# Altium PCB pcb_take2.PcbDoc (part 1 of 3)
Units mm, origin at the board's own origin, x right, y up, seen from the top; angles counter-clockwise.
Board outline 120 x 150 mm, 8 copper layers (Top Layer, Power plane, Mid-Layer 1, Mid-Layer 2, Mid-Layer 3, MidLayer4, GND plane, Bottom Layer); 176 components, 197 nets, 1014 pads, 576 vias.
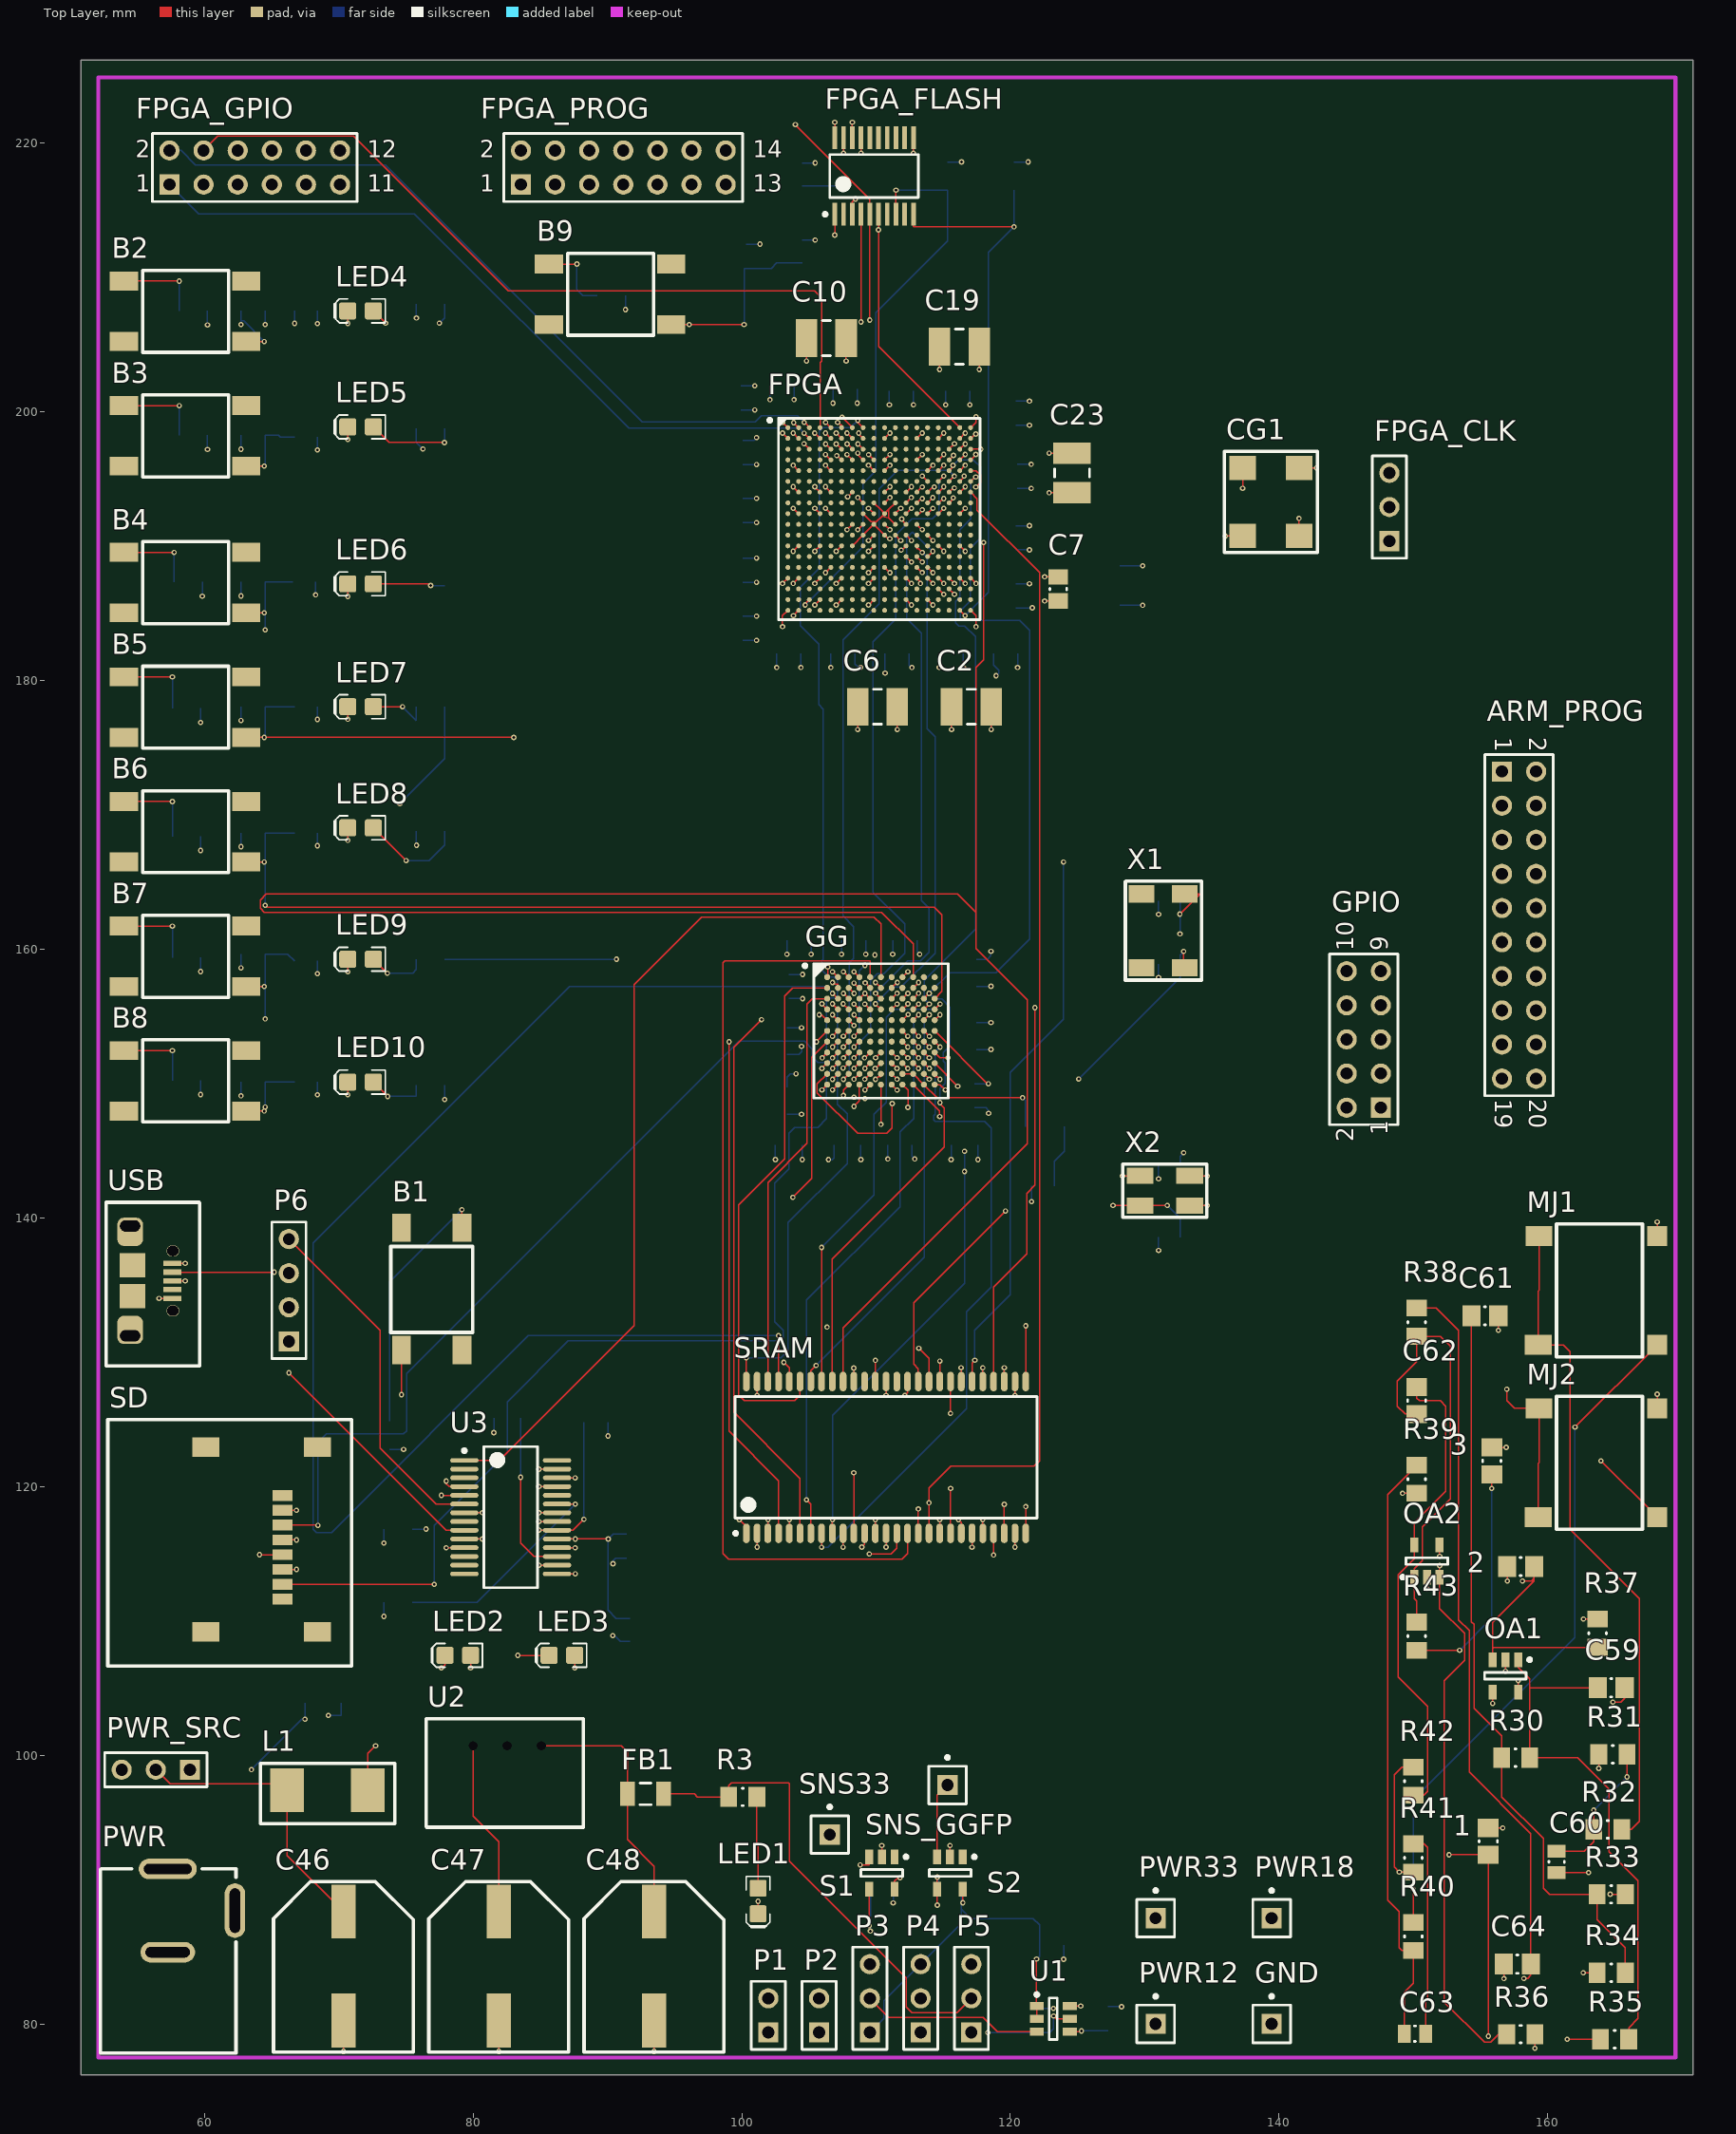
[diagram p0: Top Layer view]
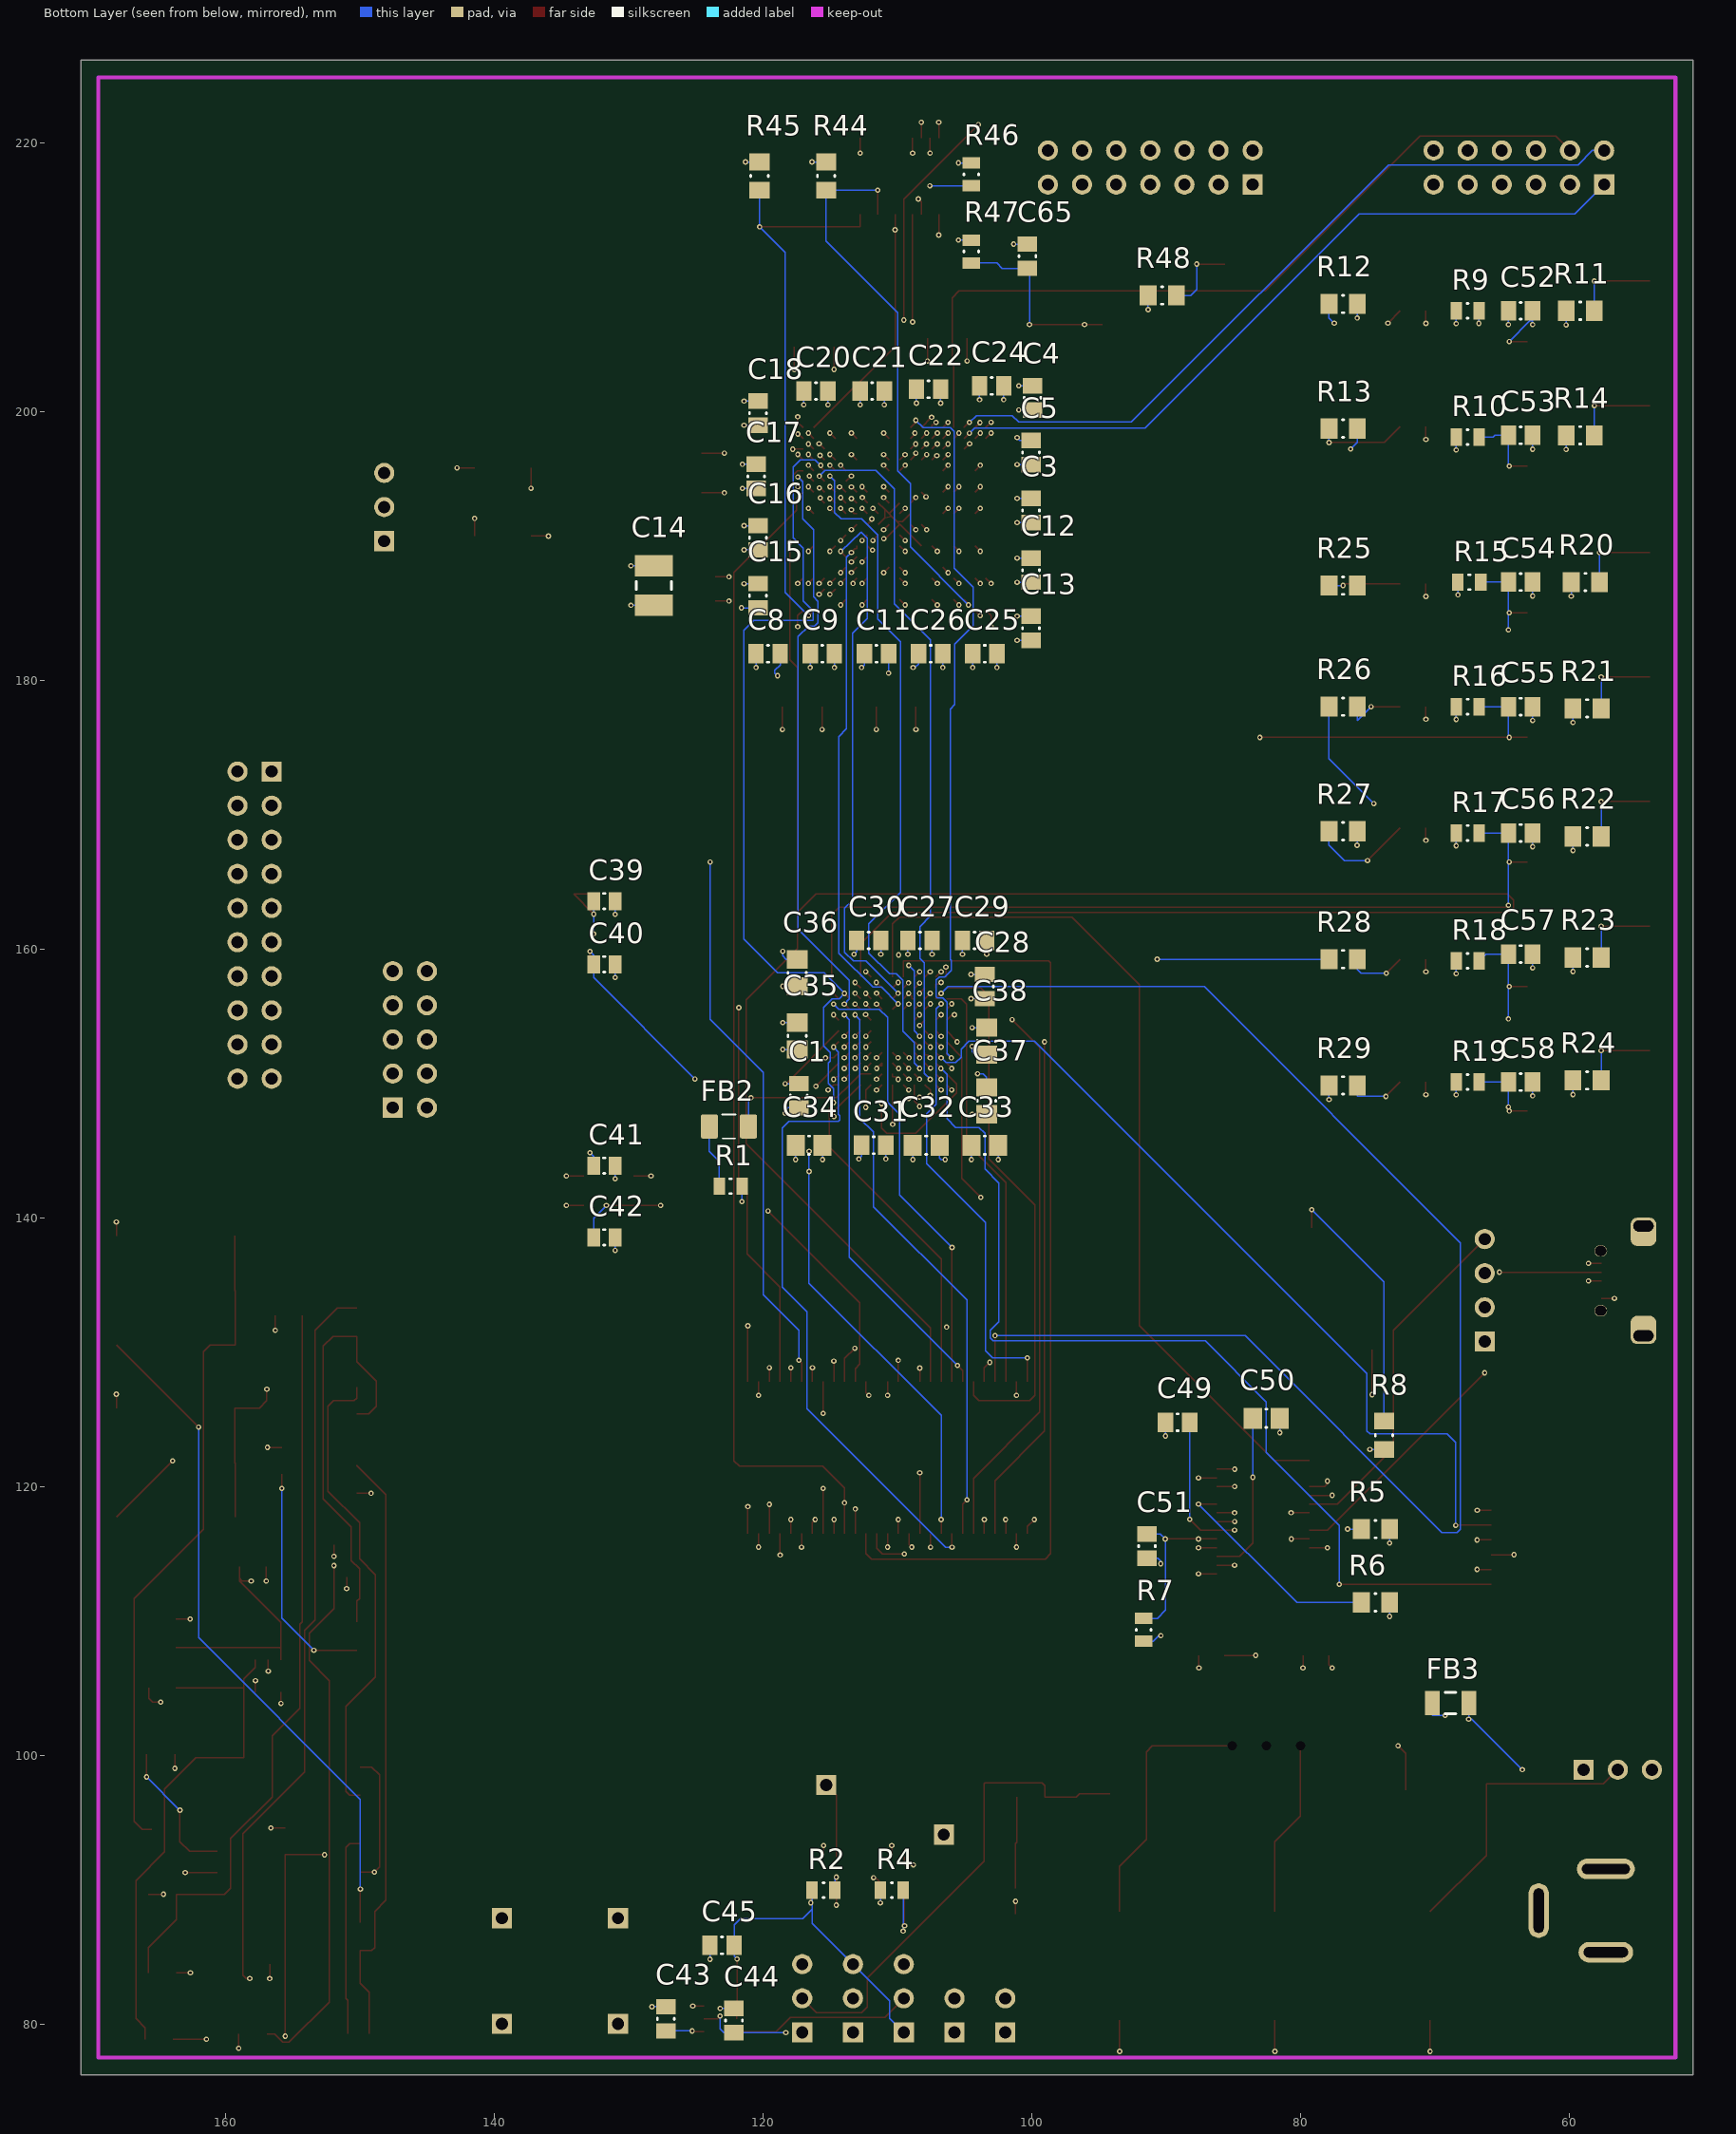
[diagram p1: Bottom Layer view, seen from below]
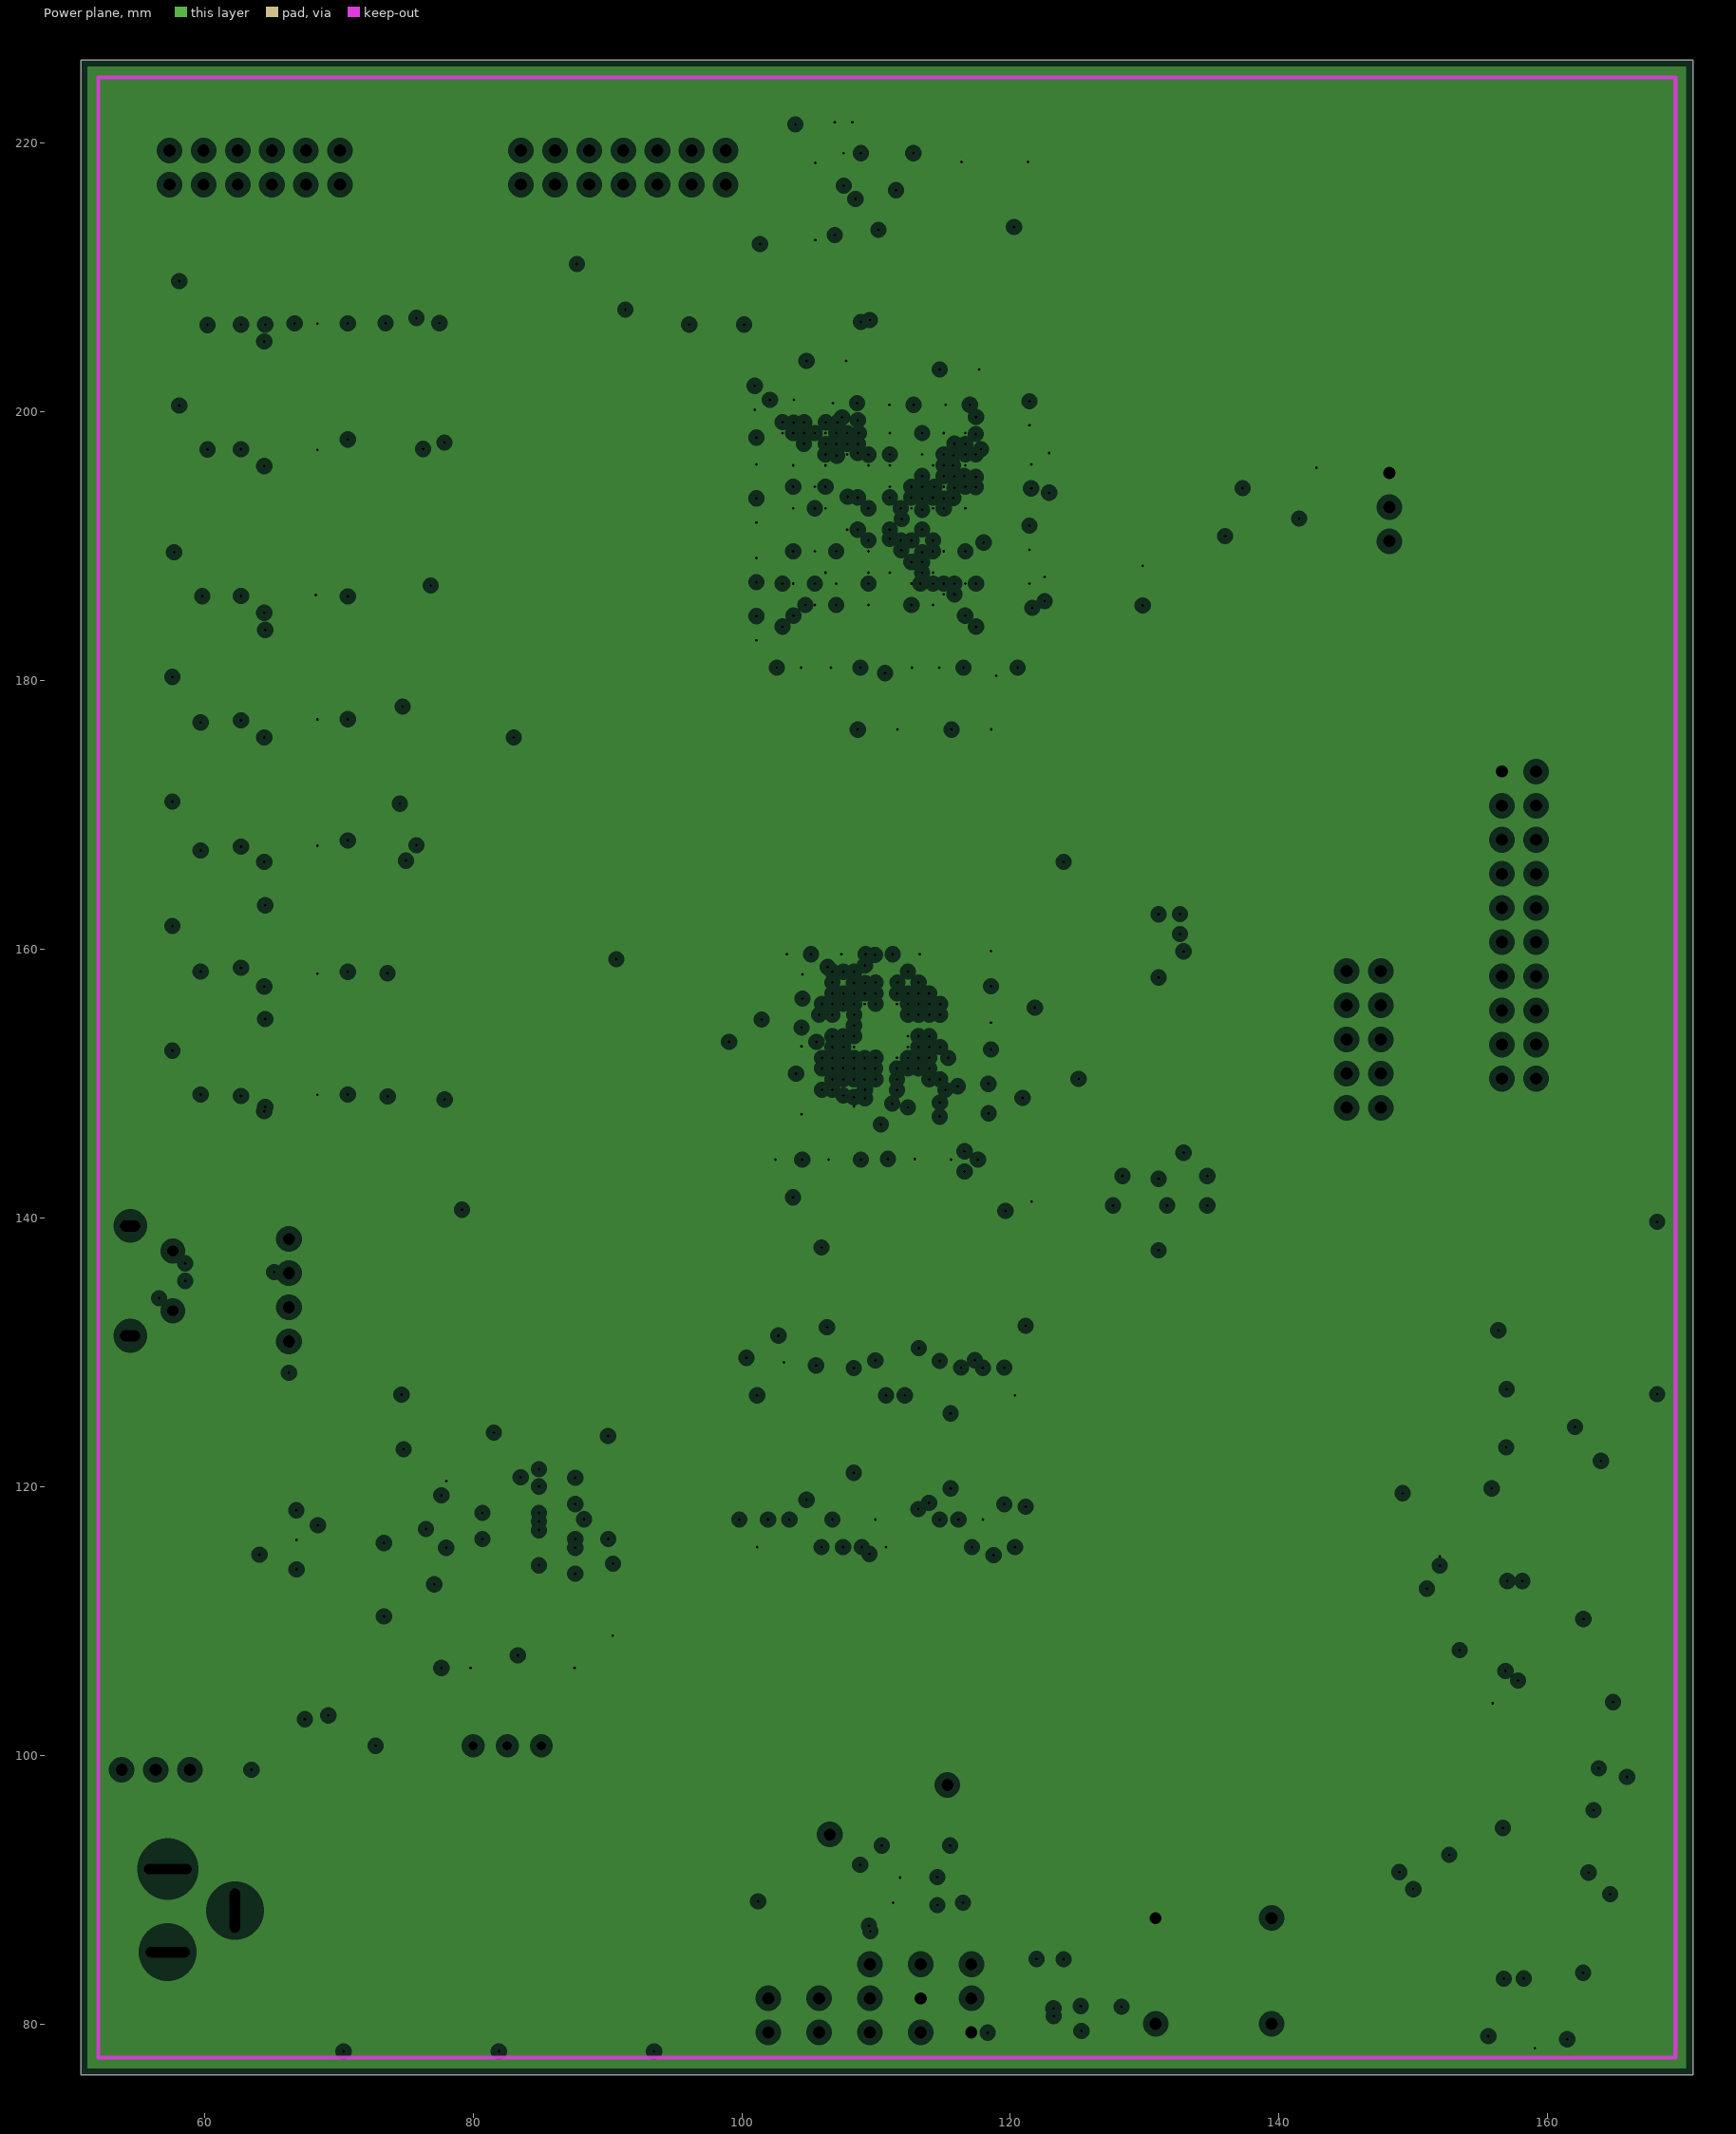
[diagram p2: Power plane, clearances drawn from the general rule]
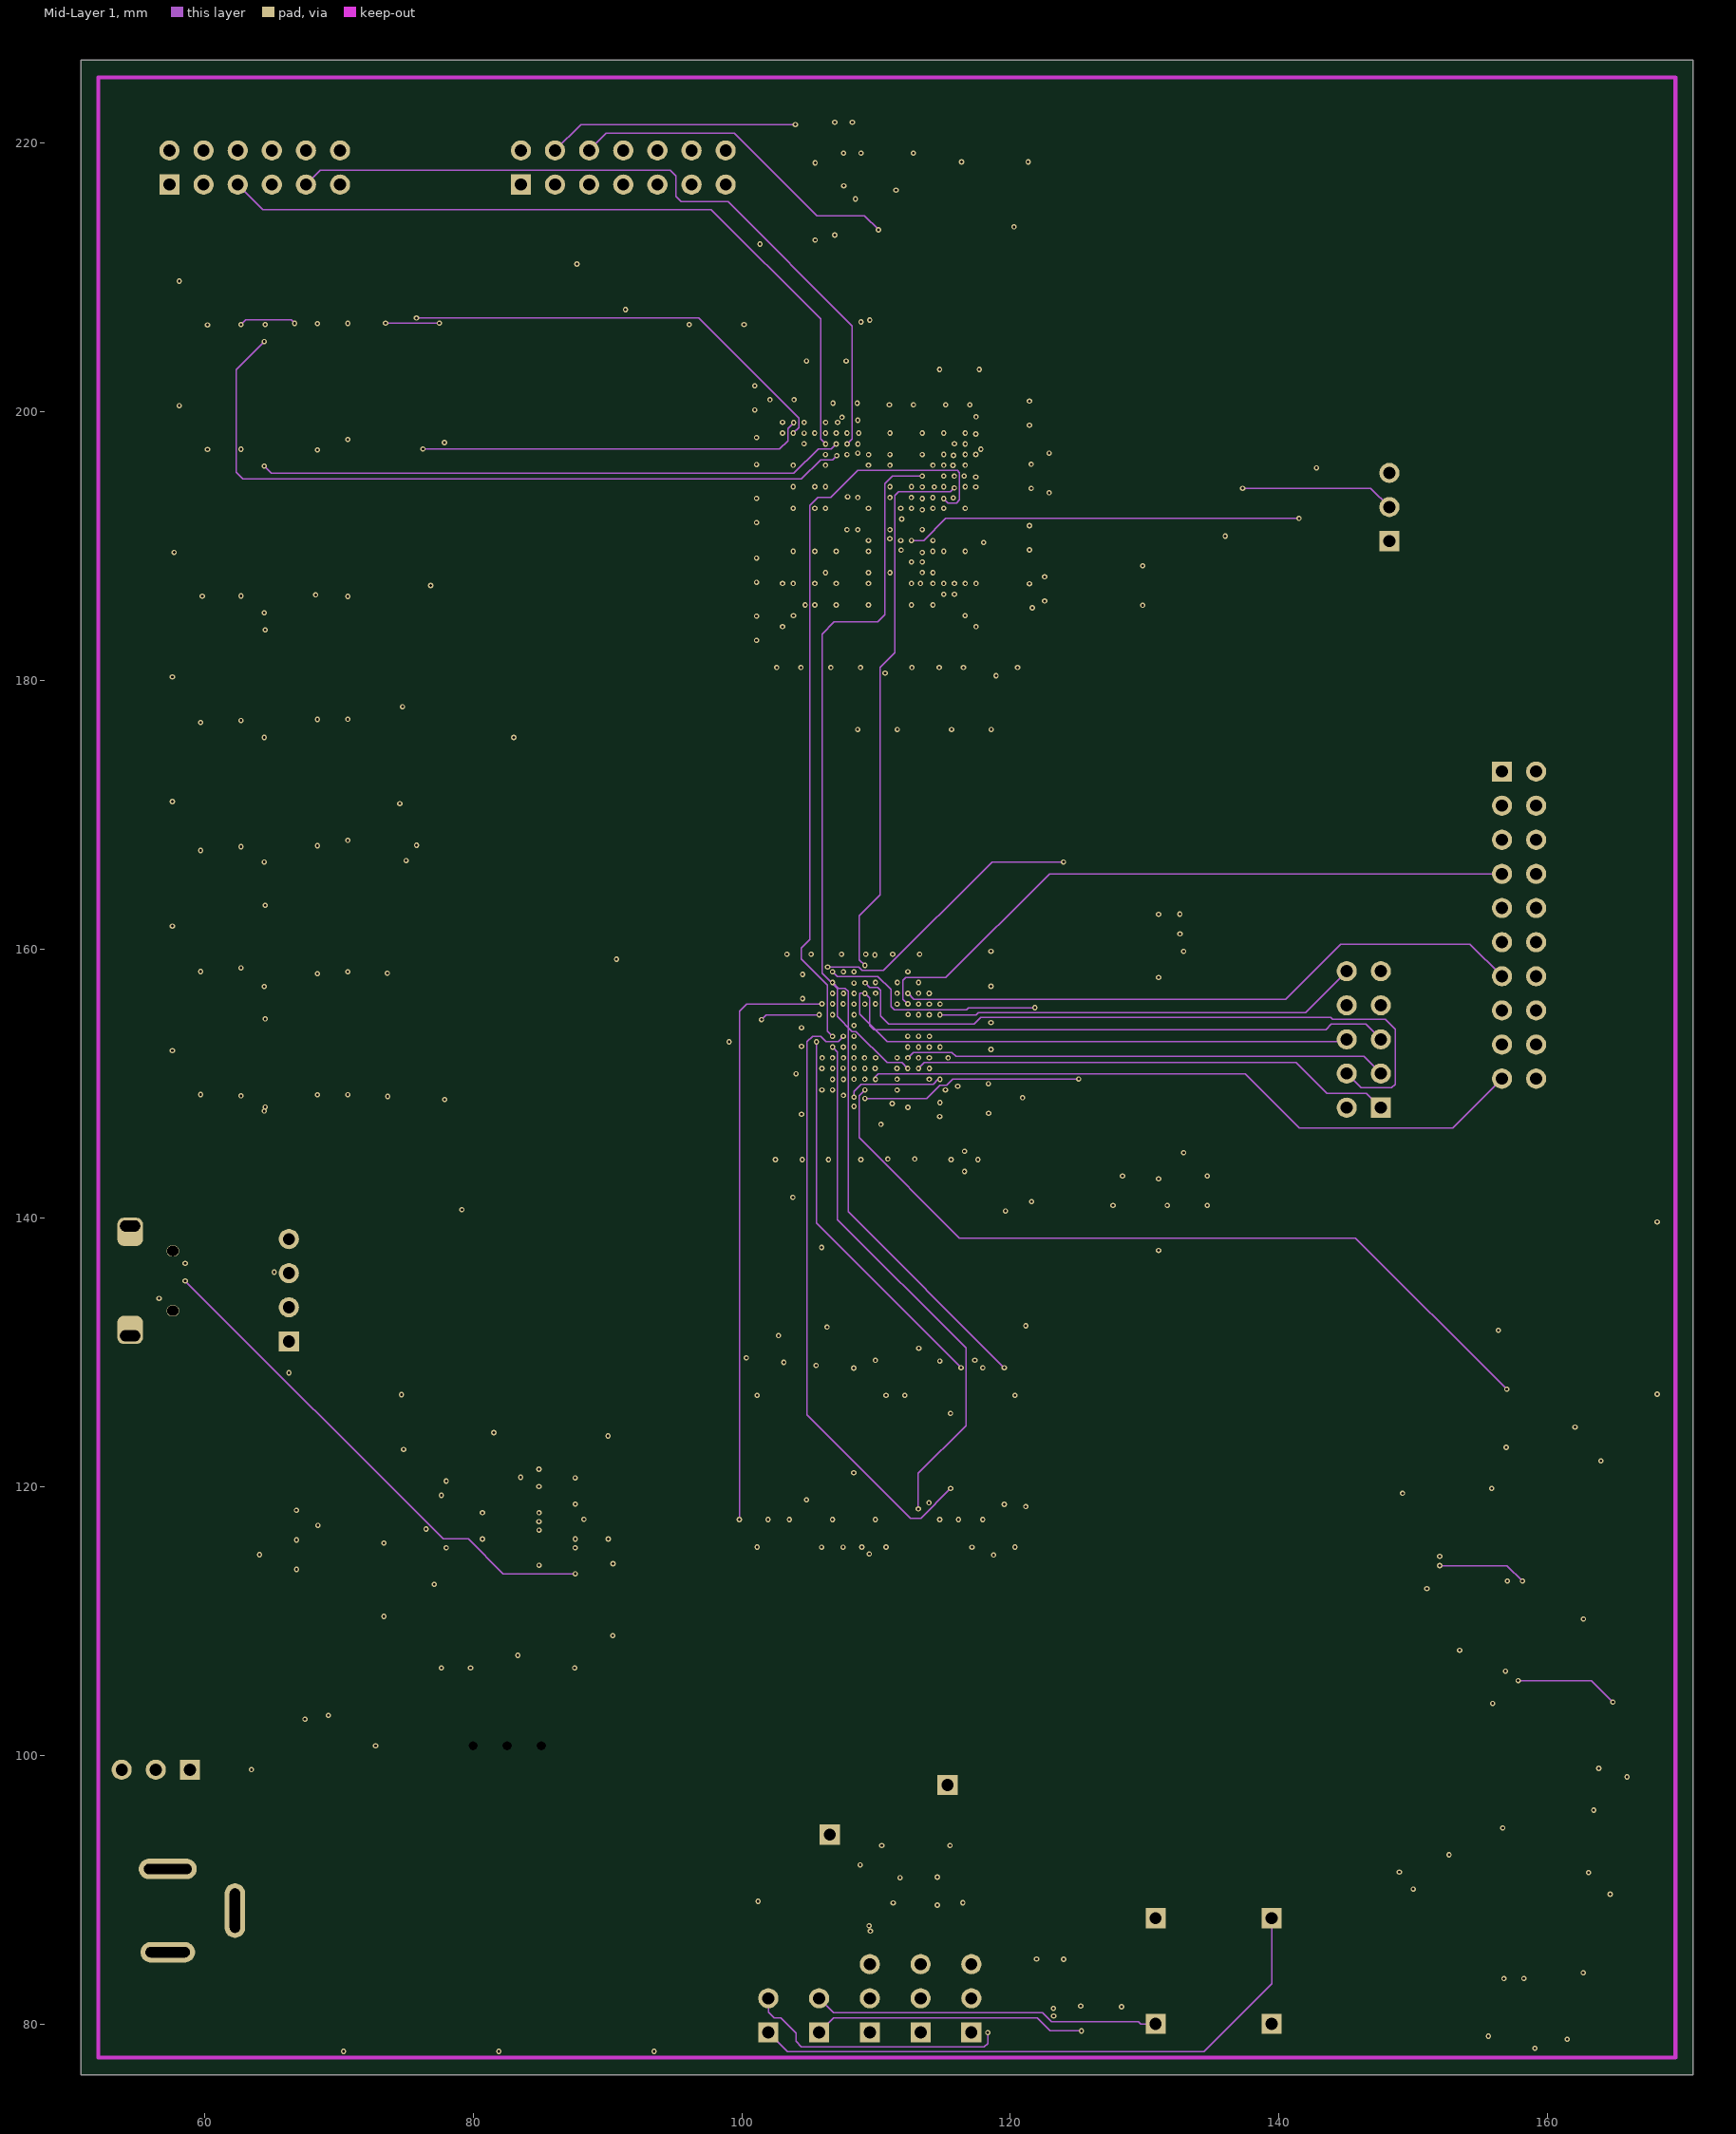
[diagram p3: Mid-Layer 1]
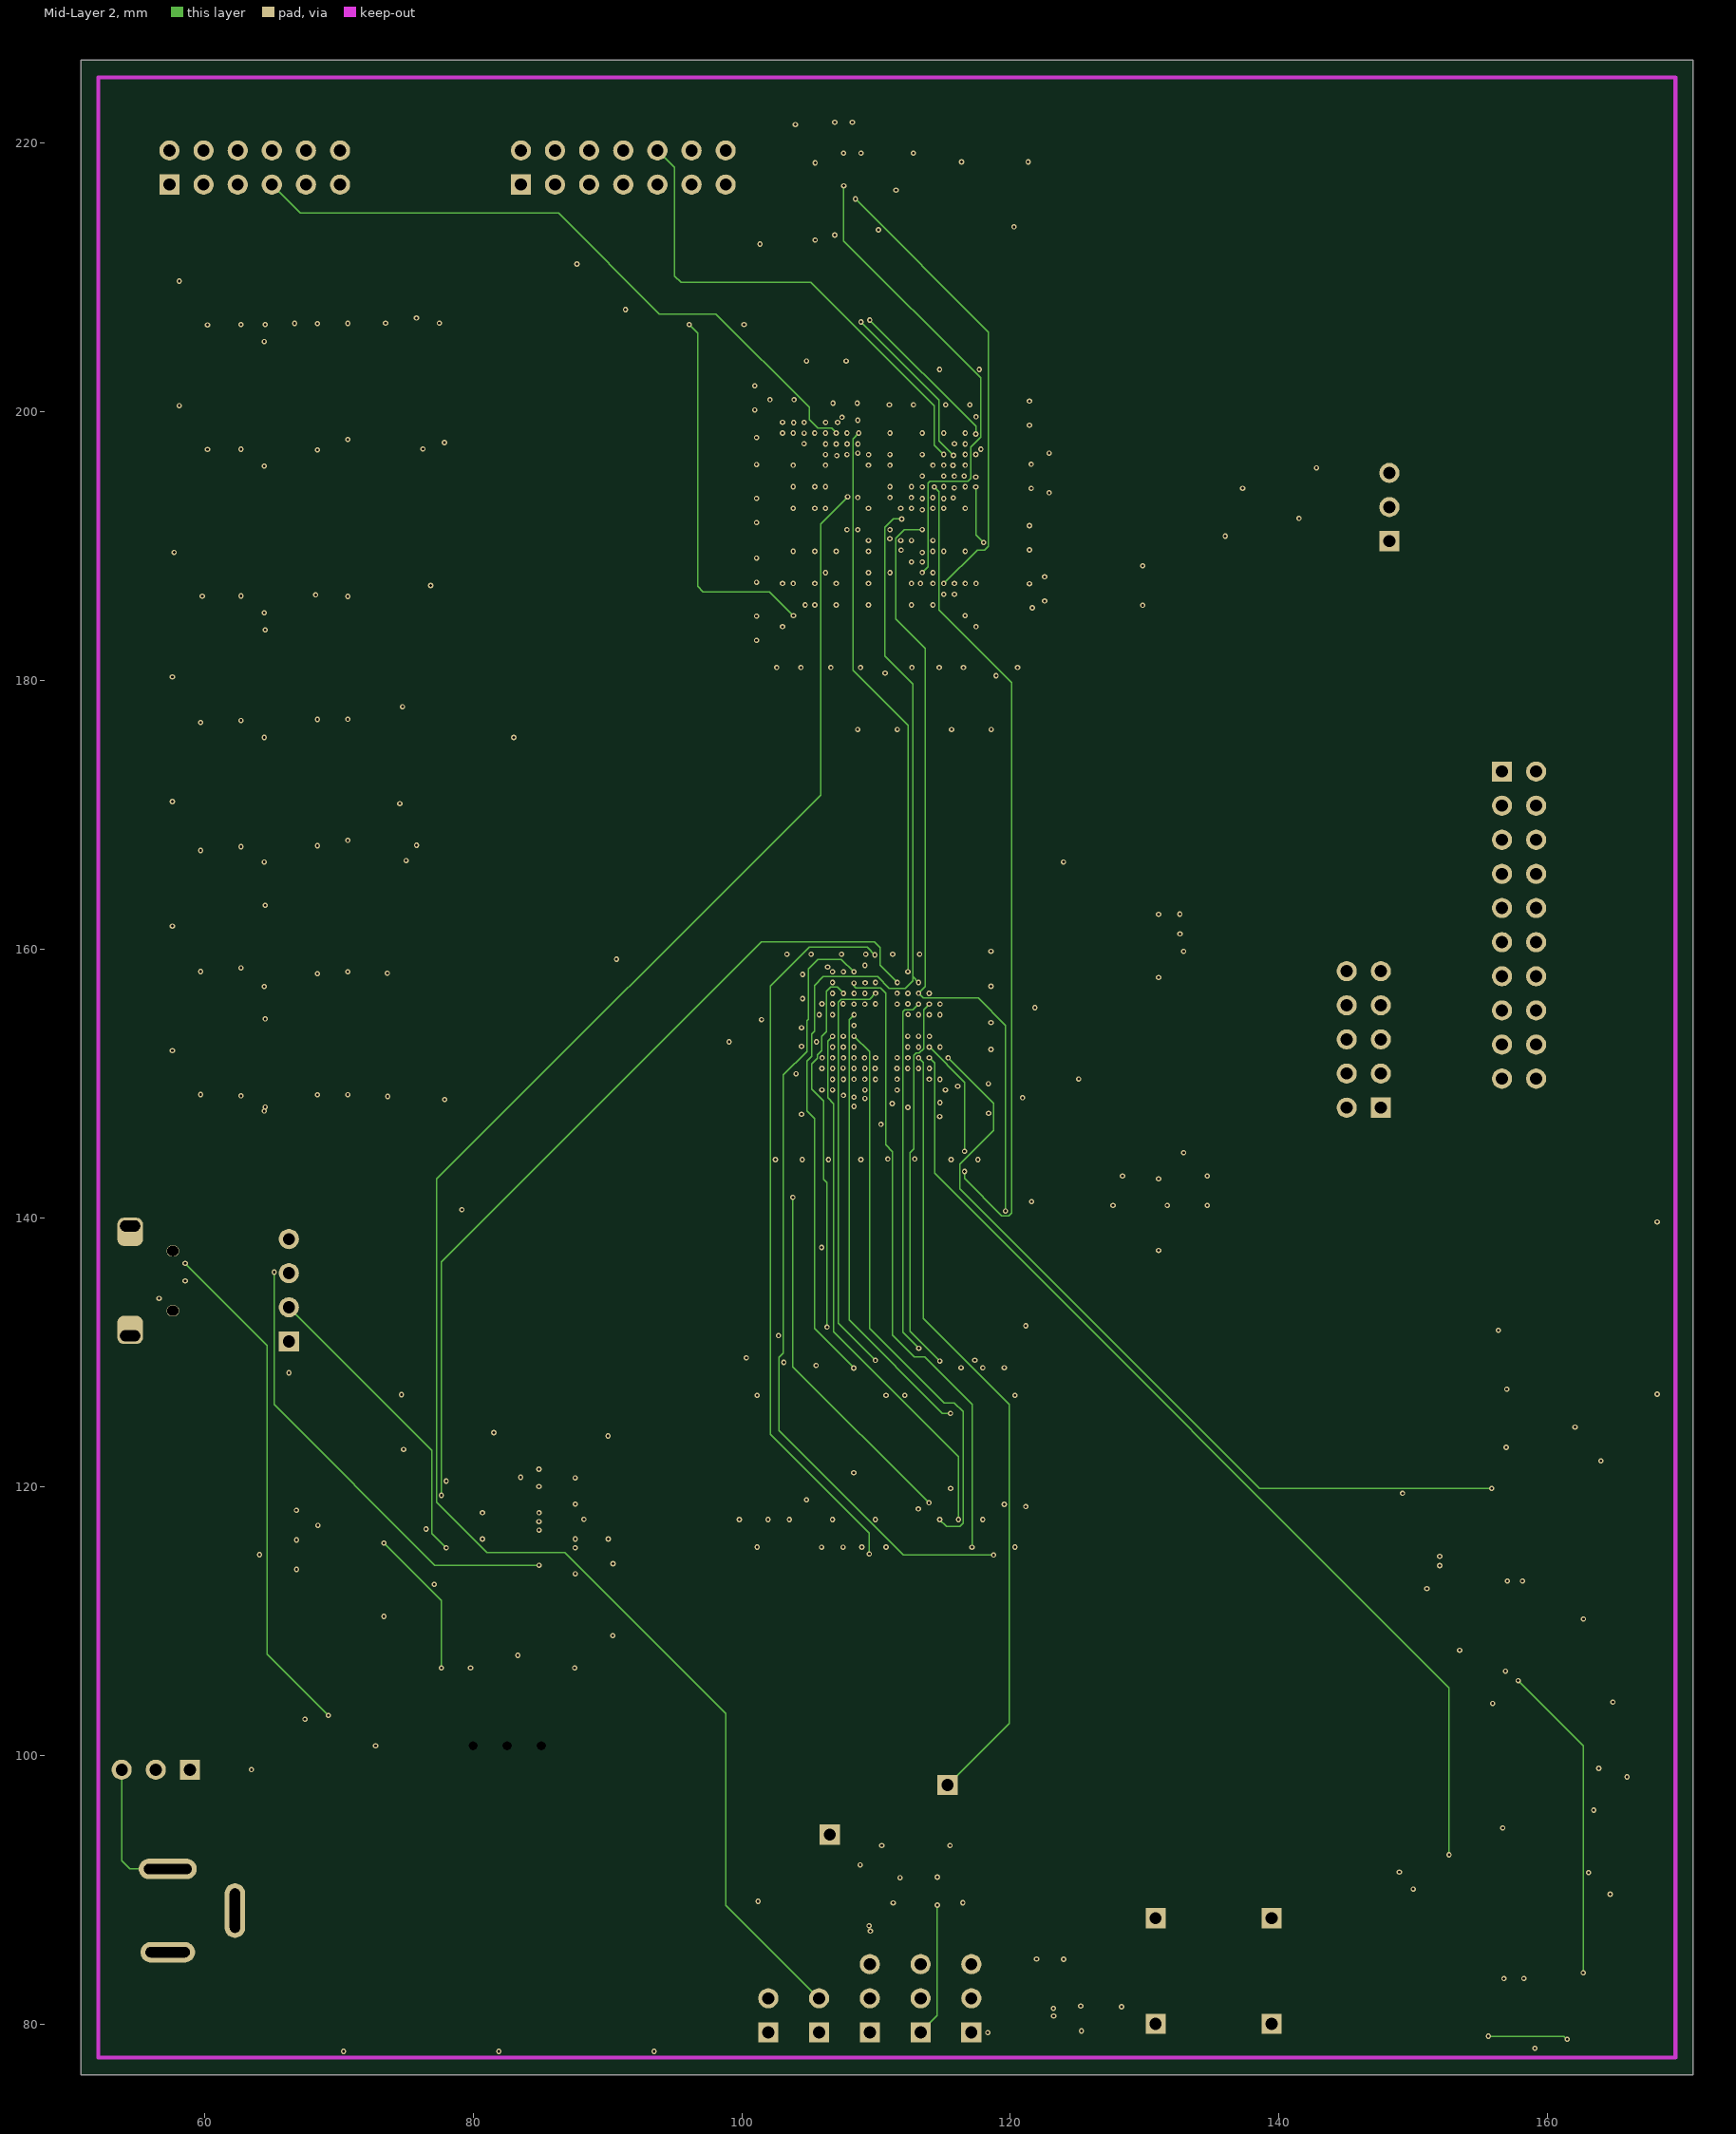
[diagram p4: Mid-Layer 2]
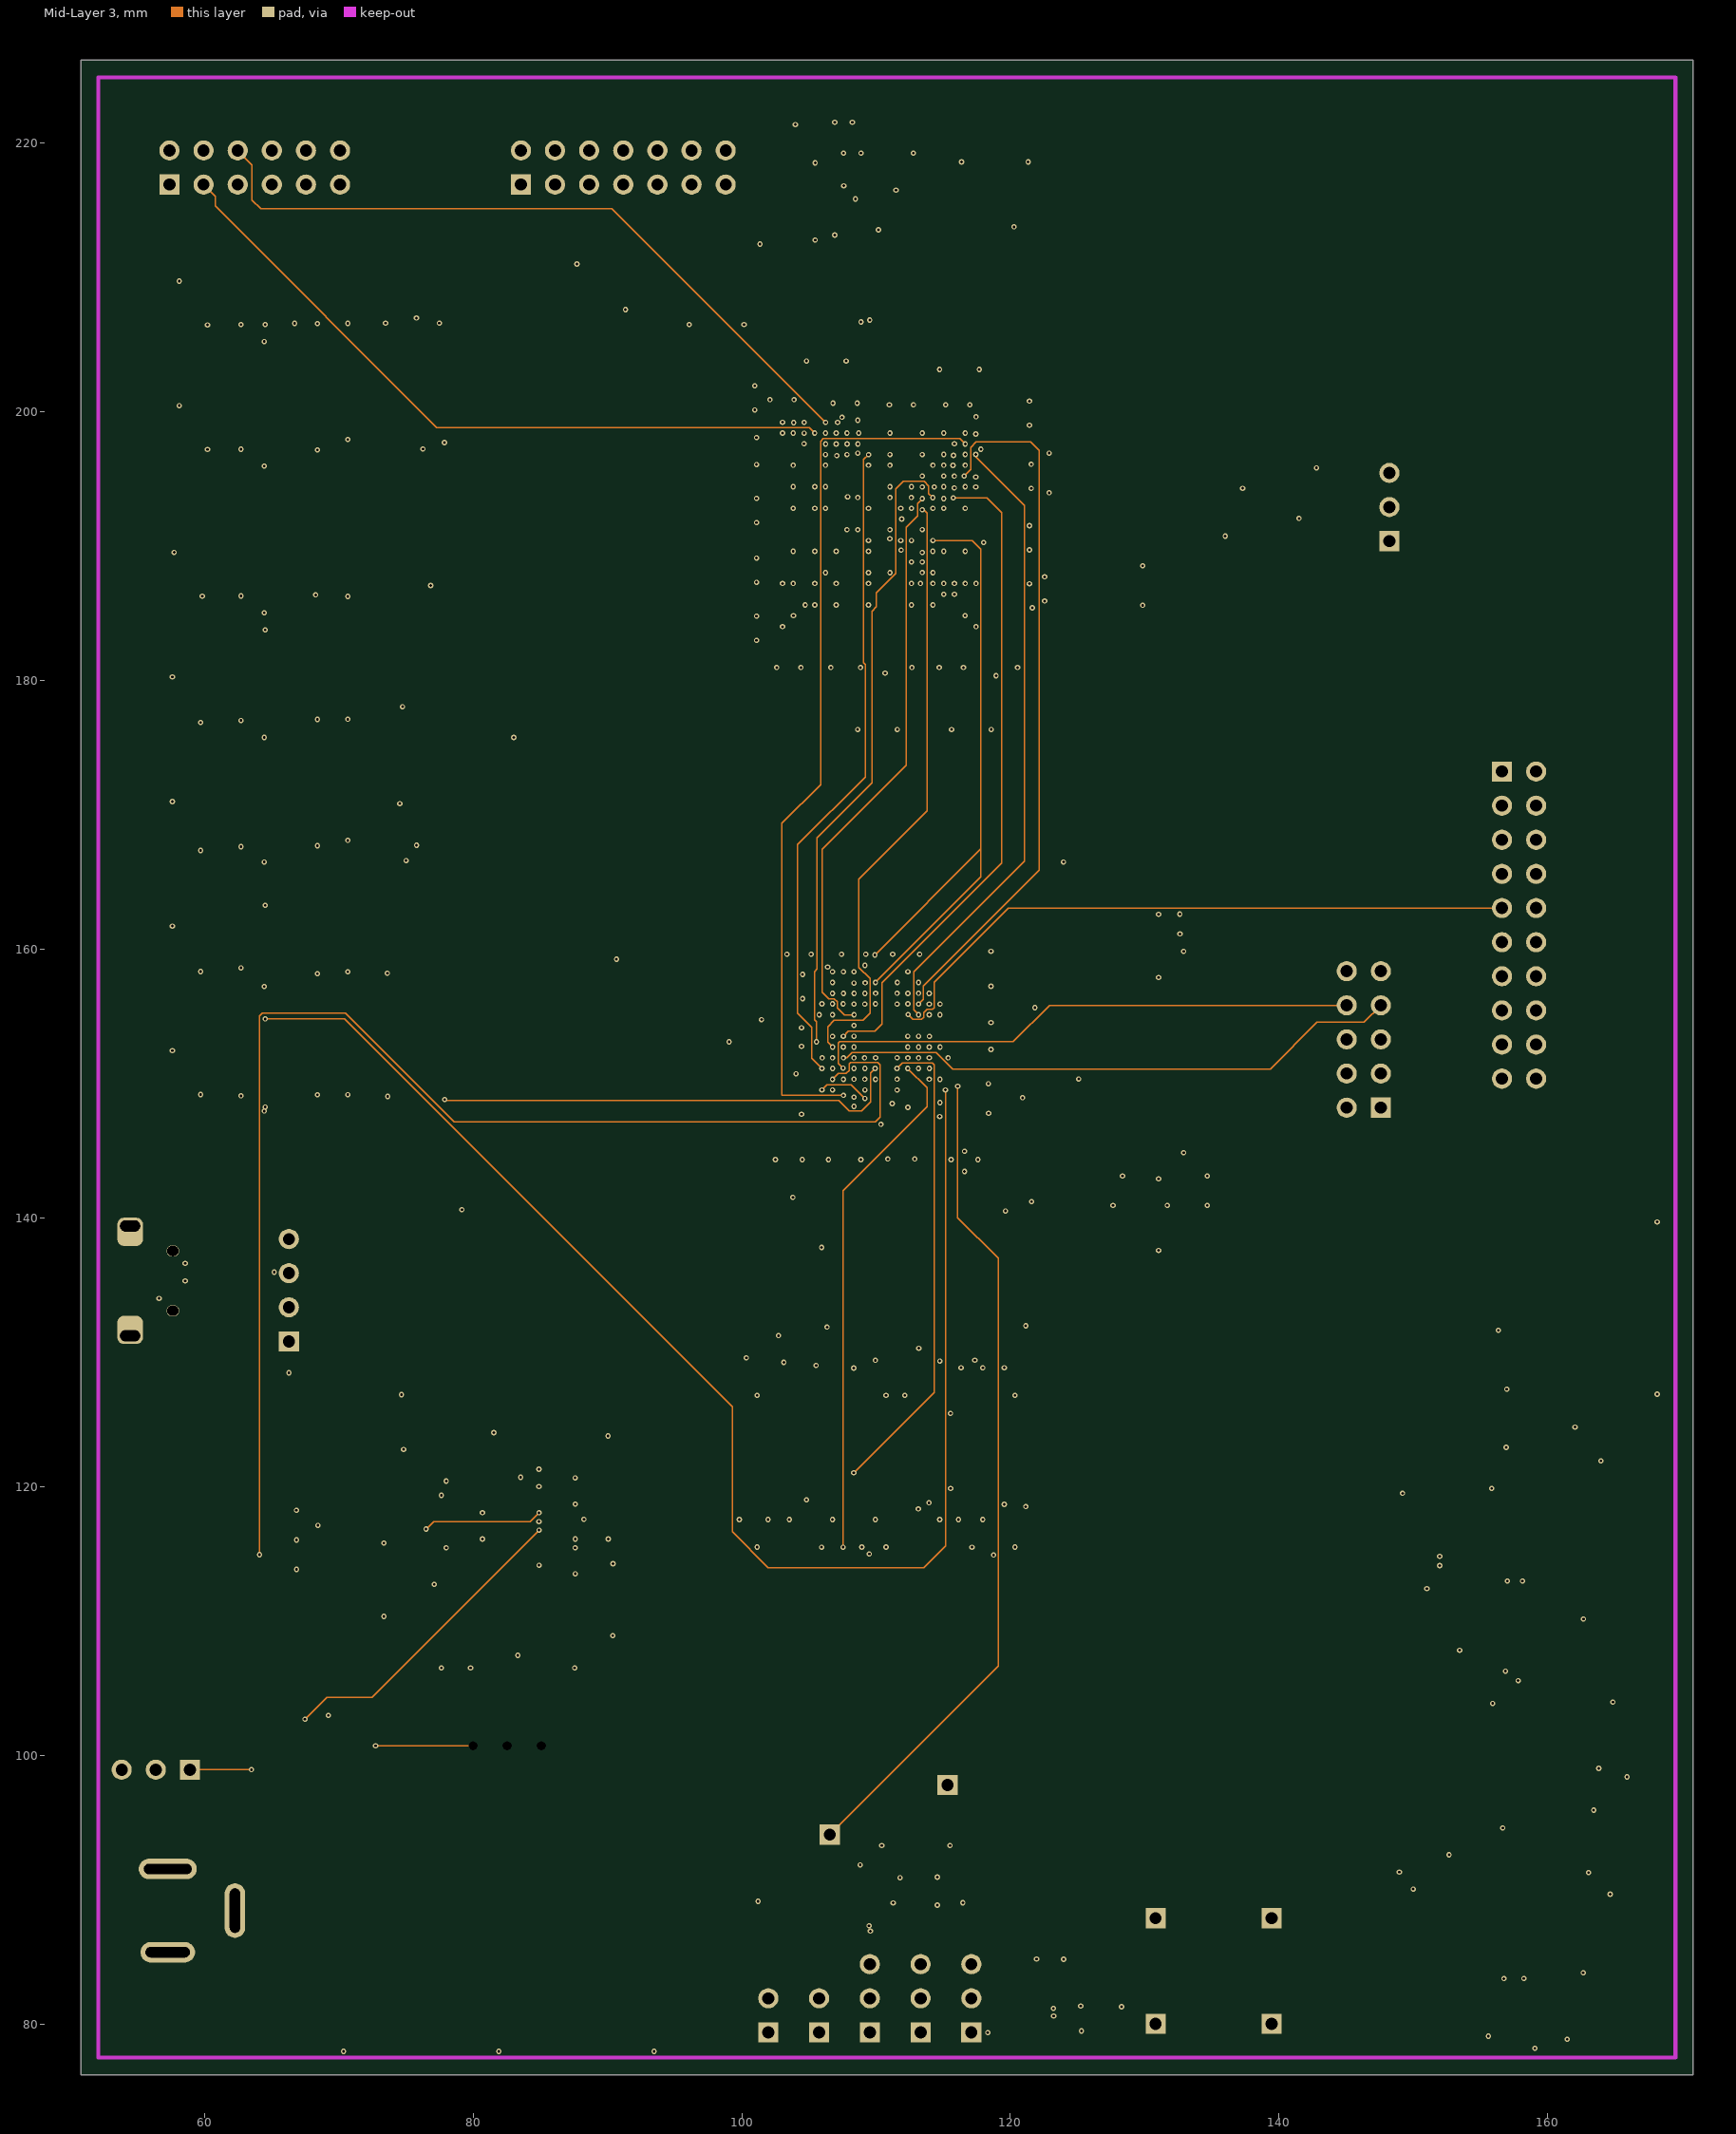
[diagram p5: Mid-Layer 3]
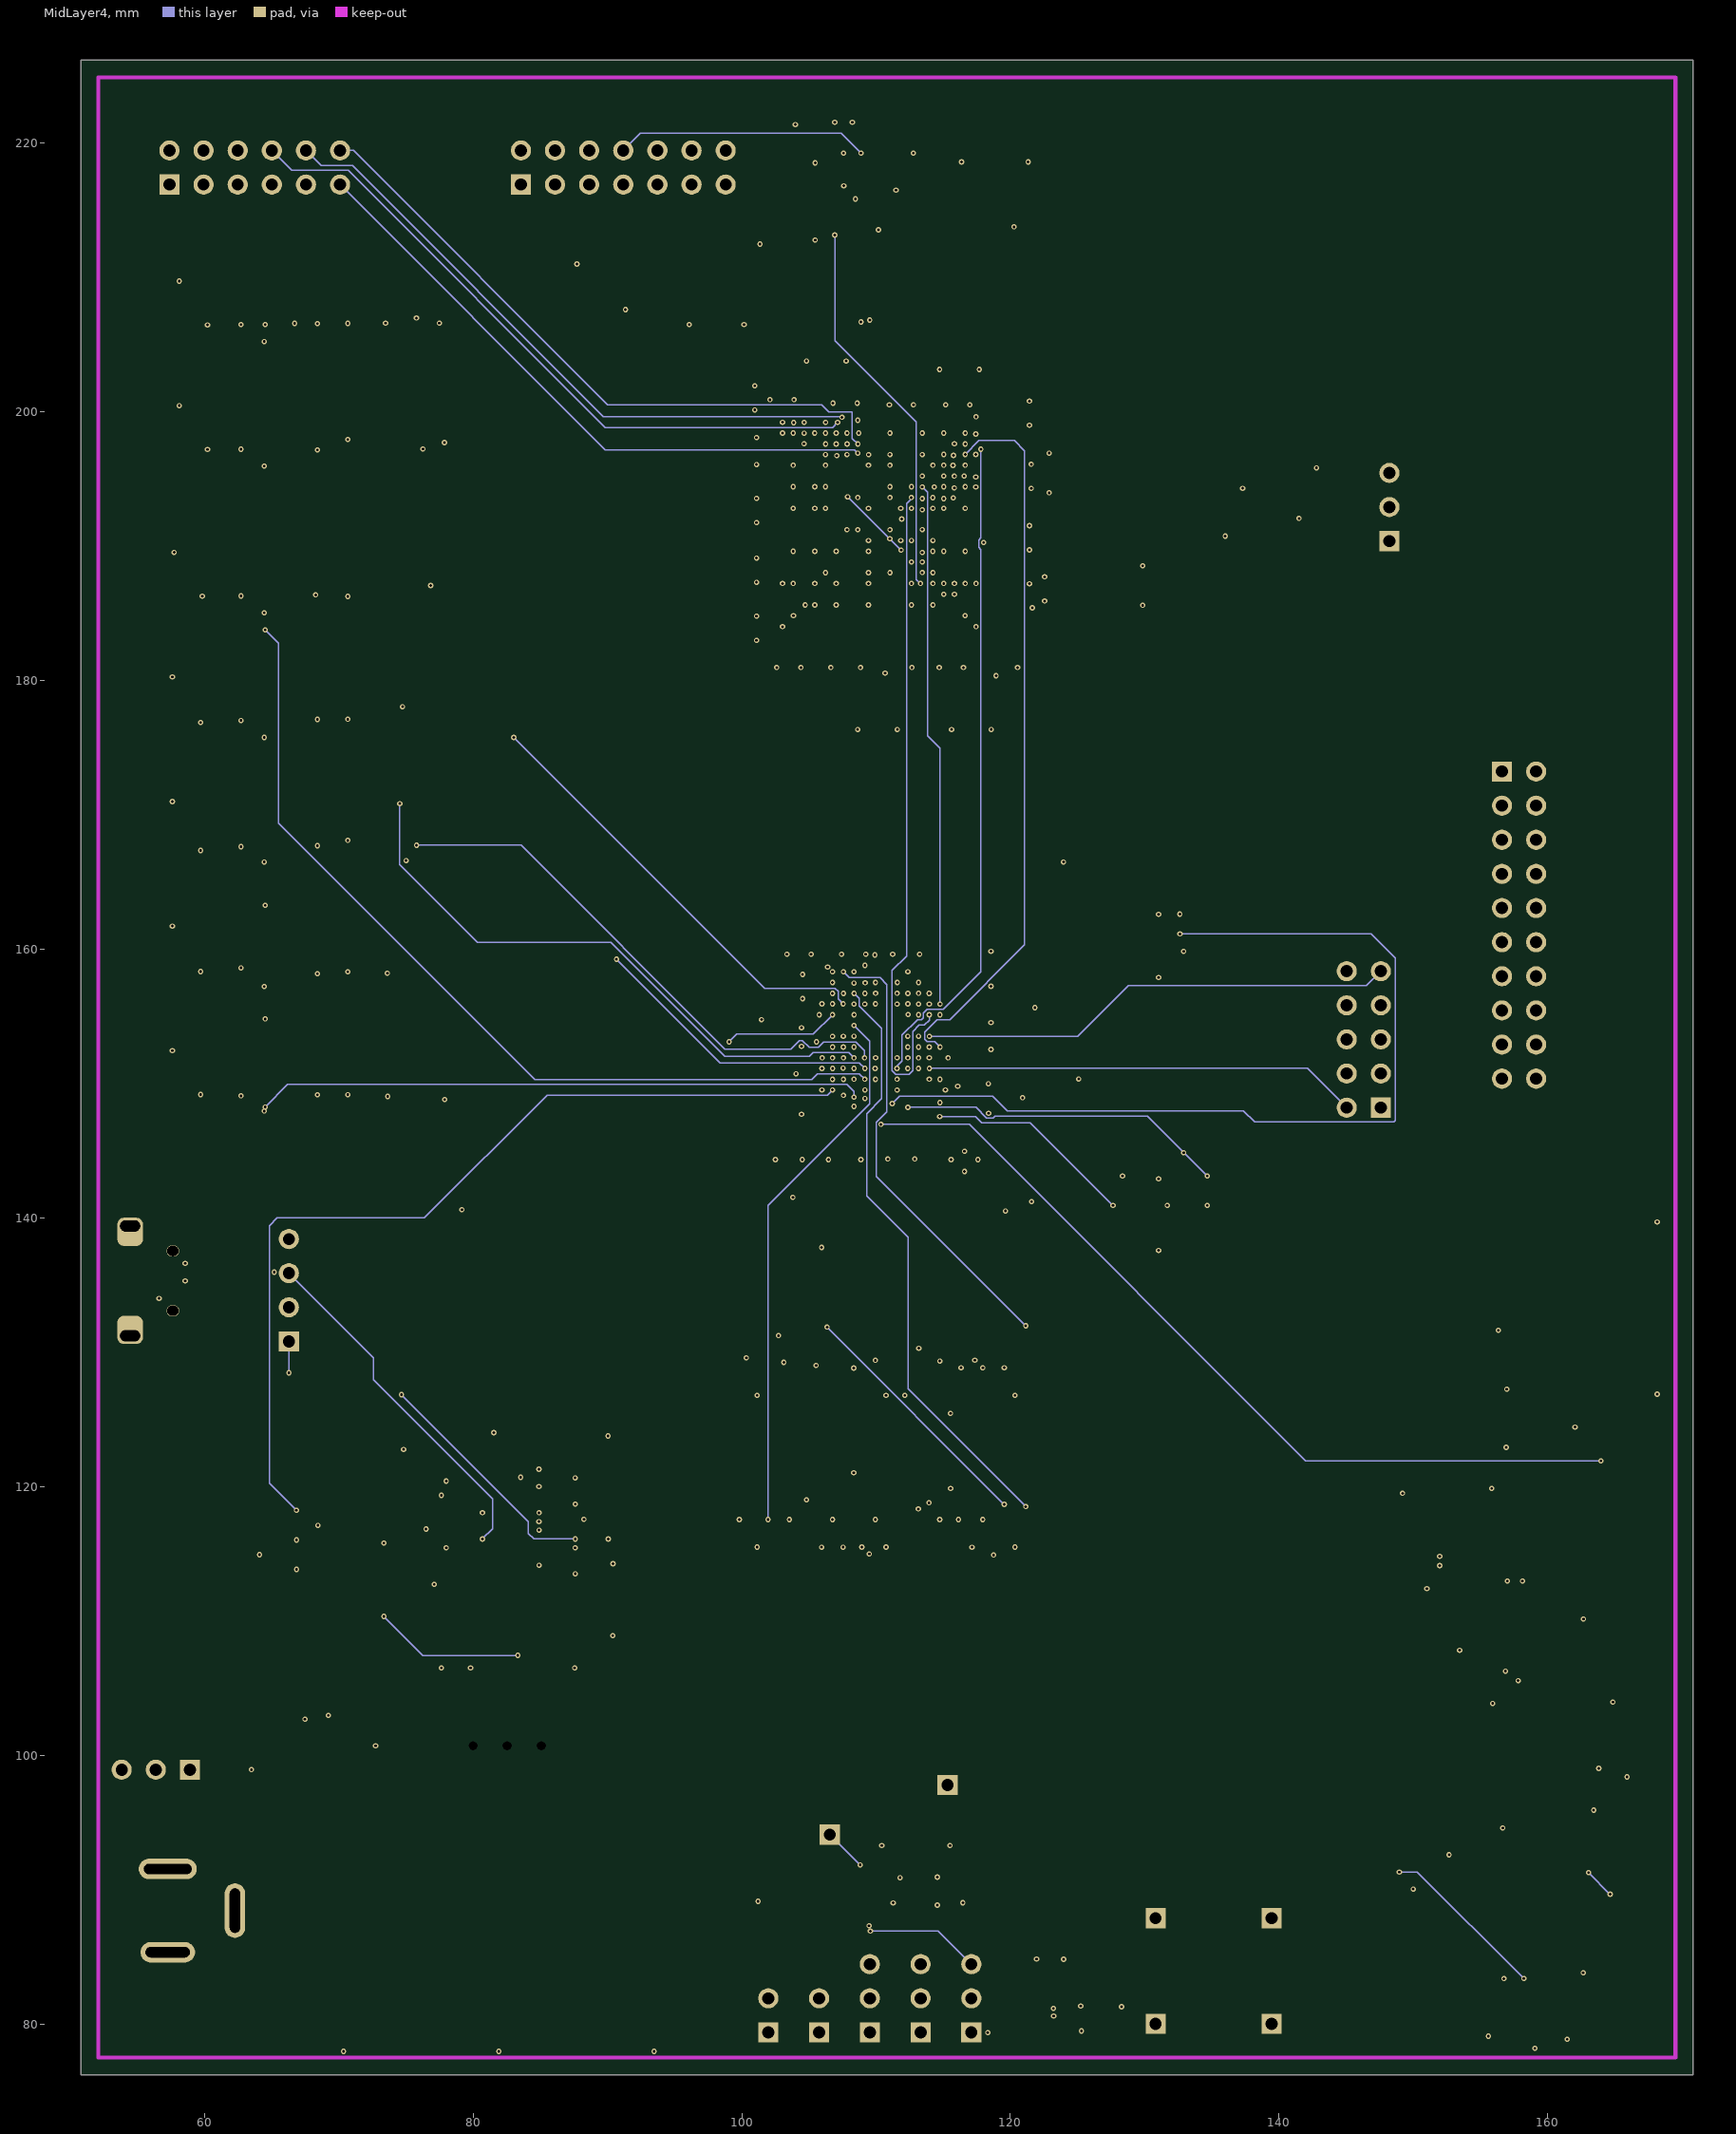
[diagram p6: MidLayer4]
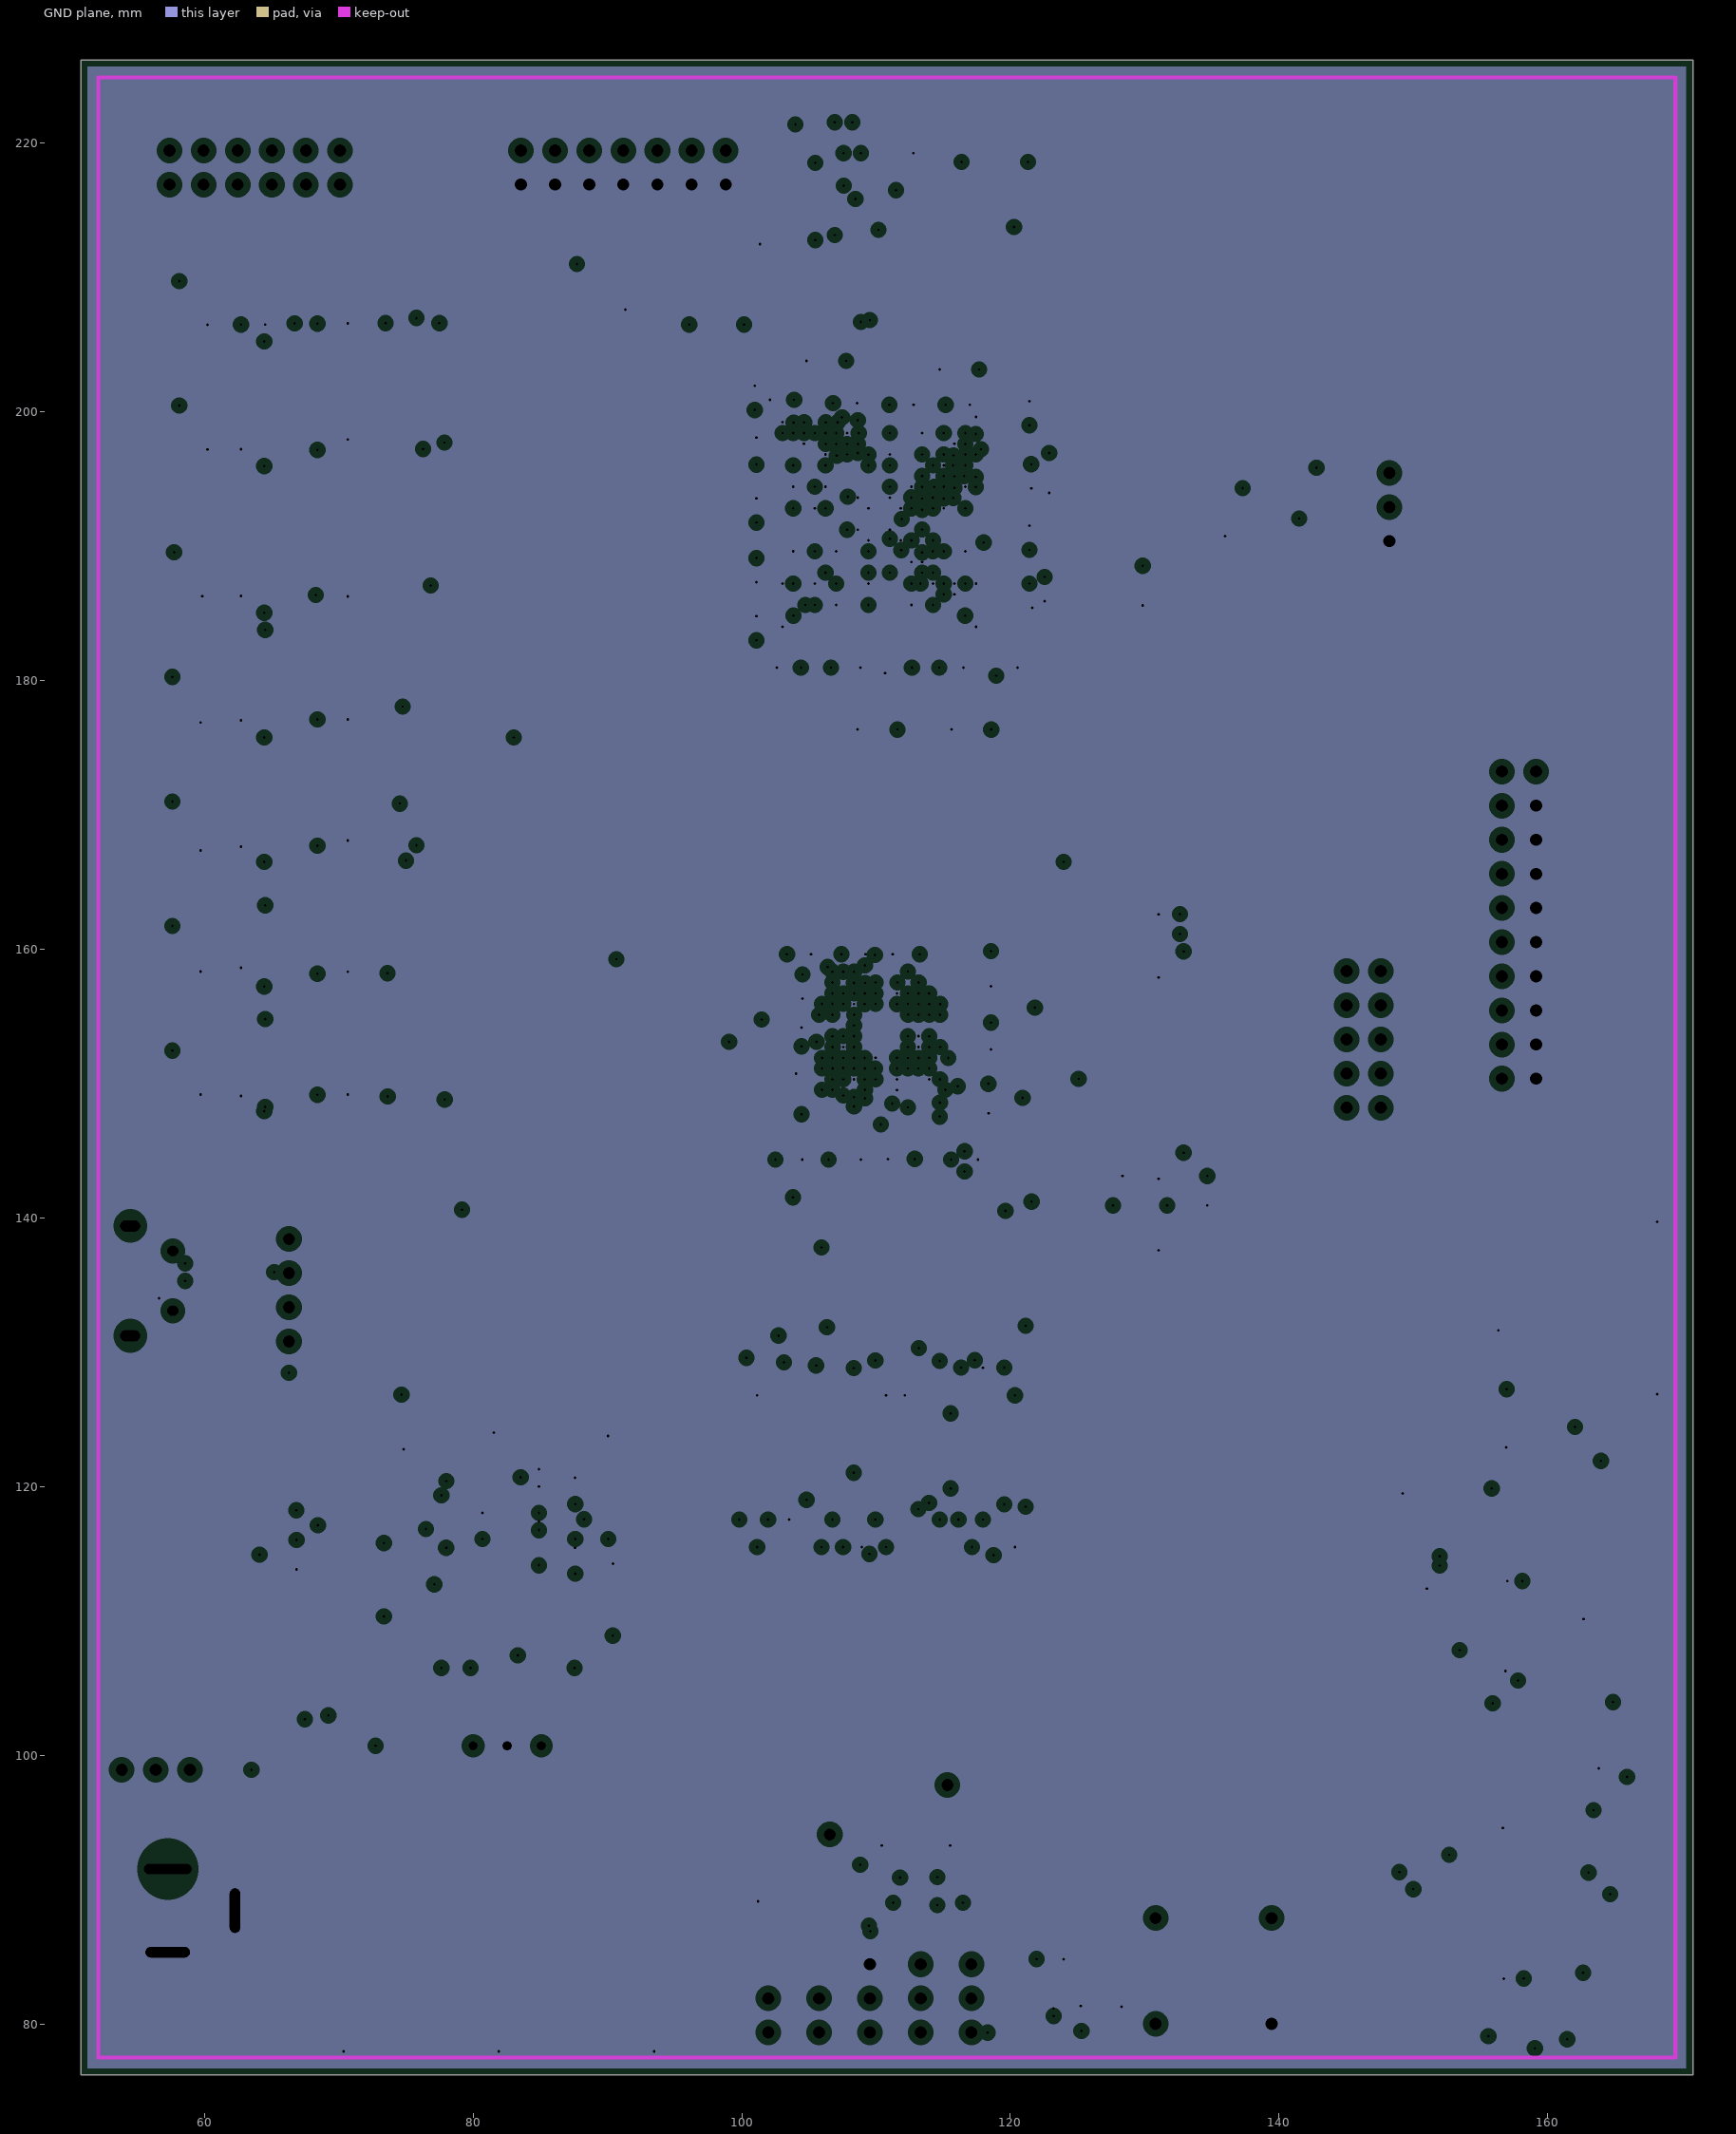
[diagram p7: GND plane, clearances drawn from the general rule]

## Layer stack, top to bottom
Top Layer: signal copper 0.0356
Dielectric: core 0.32, FR-4, Dk 4.8
Power plane: plane copper 0.0356, net VCC33
Dielectric: prepreg 0.32, FR-4, Dk 4.8
Mid-Layer 1: signal copper 0.0356
Dielectric: core 0.32, FR-4, Dk 4.8
Mid-Layer 2: signal copper 0.0356
Dielectric: prepreg 0.32, FR-4, Dk 4.8
Mid-Layer 3: signal copper 0.0356
Dielectric: core 0.32, FR-4, Dk 4.8
MidLayer4: signal copper 0.0356
Dielectric: prepreg 0.32, FR-4, Dk 4.8
GND plane: plane copper 0.0356, net GND
Dielectric: core 0.32, FR-4, Dk 4.8
Bottom Layer: signal copper 0.0356

## Board outline
50.8,76.2 170.8,76.2 170.8,226.2 50.8,226.2

## Design rules (kind name [scope] priority, off if disabled: settings)
Clearance BGA_clearance [IsTrack vs not isVia] p1: gap=0.254
Clearance [All] p2: gap=0.1
PlaneClearance [All] p1: clearance=0.508
PlaneConnect [All] p1: planeconnectstyle=Relief reliefexpansion=0.508 reliefentries=4 reliefconductorwidth=0.254 reliefairgap=0.254
PolygonConnect [All] p1: connectstyle=Relief reliefconductorwidth=0.254 reliefentries=4 polygonreliefangle="90 Angle" airgapwidth=0.254
RoutingVias [All] p1: holewidth=0.2 width=0.4 viastyle="Through Hole" minholewidth=0.2 minwidth=0.35 maxholewidth=1 maxwidth=4
SolderMaskExpansion [All] p1: expansion=0.102
Width [All] p1: maxlimit=2 minlimit=0.1 preferedwidth=0.1
26 further rules are at their usual default settings.

## Classes and differential pairs
net class JACK_IN[1..0]: JACK_IN0 JACK_IN1
net class GPIO_FPGA[15..0]: GPIO_FPGA0 GPIO_FPGA1 GPIO_FPGA2 GPIO_FPGA3 GPIO_FPGA4 GPIO_FPGA5 GPIO_FPGA6 GPIO_FPGA7 GPIO_FPGA8 GPIO_FPGA9 GPIO_FPGA10 GPIO_FPGA11 GPIO_FPGA12 GPIO_FPGA13 GPIO_FPGA14 GPIO_FPGA15
net class GPIO[22..0]: GPIO0 GPIO1 GPIO2 GPIO3 GPIO4 GPIO5 GPIO6 GPIO7 GPIO8 GPIO9 GPIO10 GPIO11 GPIO12 GPIO13 GPIO14 GPIO15 GPIO16 GPIO17 GPIO18 GPIO19 GPIO20 GPIO21 GPIO22
net class EBI_AD[15..0]: EBI_AD0 EBI_AD1 EBI_AD2 EBI_AD3 EBI_AD4 EBI_AD5 EBI_AD6 EBI_AD7 EBI_AD8 EBI_AD9 EBI_AD10 EBI_AD11 EBI_AD12 EBI_AD13 EBI_AD14 EBI_AD15
net class EBI_A[22..0]: EBI_A0 EBI_A1 EBI_A2 EBI_A3 EBI_A4 EBI_A5 EBI_A6 EBI_A7 EBI_A8 EBI_A9 EBI_A10 EBI_A11 EBI_A12 EBI_A13 EBI_A14 EBI_A15 EBI_A16 EBI_A17 EBI_A18 EBI_A19 EBI_A20 EBI_A21 EBI_A22
net class CTRL_BUS[2..0]: CTRL_BUS0 CTRL_BUS1 CTRL_BUS2
component class U_user_interface: B2 B3 B4 B5 B6 B7 B8 C52 C53 C54 C55 C56 C57 C58 FPGA_GPIO GPIO LED4 LED5 LED6 LED7 LED8 LED9 LED10 R9 R10 R11 R12 R13 R14 R15 R16 R17 R18 R19 R20 R21 R22 R23 R24 R25 R26 R27 R28 R29 SD
component class U_uart_usb_bridge: B1 C49 C50 C51 FB3 LED2 LED3 P6 R5 R6 R7 R8 U3 USB
component class U_sram: SRAM
component class U_power_supply: C43 C44 C45 C46 C47 C48 FB1 GND L1 LED1 P1 P2 P3 P4 P5 PWR PWR12 PWR18 PWR33 PWR_SRC R2 R3 R4 S1 S2 SNS33 SNS_GGFP U1 U2
component class U_oscillation: C39 C40 C41 C42 CG1 FPGA_CLK X1 X2
component class U_fpga_sheet: FPGA
component class U_fpga_power: C2 C3 C4 C5 C6 C7 C8 C9 C10 C11 C12 C13 C14 C15 C16 C17 C18 C19 C20 C21 C22 C23 C24 C25 C26
component class U_fpga_flash_debug: B9 C65 FPGA_FLASH FPGA_PROG R44 R45 R46 R47 R48
component class U_audio_interface: 1 2 3 C59 C60 C61 C62 C63 C64 MJ1 MJ2 OA1 OA2 R30 R31 R32 R33 R34 R35 R36 R37 R38 R39 R40 R41 R42 R43
component class U_arm_sheet: ARM_PROG C1 GG
component class U_arm_power: C27 C28 C29 C30 C31 C32 C33 C34 C35 C36 C37 C38 FB2 R1

## Components (designator, comment, footprint, x,y, rotation, side; value= is the part's Value field where it differs from the comment)
1 "10nF" CAPC0805(2012)100_M 155.575,93.599 r90 top
2 "100nF" CAPC0805(2012)100_M 157.988,114.046 r180 top
3 "10nF" CAPC0805(2012)100_M 155.829,121.92 r90 top
ARM_PROG "Header 10X2" HDR2X10 156.591,173.228 r270 top
B1 "BUTTON" BUTTON 74.676,130.175 r180 top
B2 "BUTTON" BUTTON 63.119,205.232 r270 top
B3 "BUTTON" BUTTON 63.119,195.961 r270 top
B4 "BUTTON" BUTTON 63.119,185.039 r270 top
B5 "BUTTON" BUTTON 63.119,175.768 r270 top
B6 "BUTTON" BUTTON 63.119,166.497 r270 top
B7 "BUTTON" BUTTON 63.119,157.226 r270 top
B8 "BUTTON" BUTTON 63.119,147.955 r270 top
B9 "BUTTON" BUTTON 94.742,206.502 r270 top
C1 "1uF" CAPC0805(2012)100_N 117.348,149.098 r270 bottom
C2 "100uF" CAPC1210(3225)280A_M 117.094,178.054 r0 top
C3 "4.7uF" CAPC0805(2012)145_N 100.076,192.659 r270 bottom
C4 "470nF" CAPC0805(2012)100_N 99.949,201.041 r270 bottom
C5 "470nF" CAPC0805(2012)100_N 100.076,196.977 r270 bottom
C6 "100uF" CAPC1210(3225)280A_M 110.109,178.054 r0 top
C7 "4.7uF" CAPC0805(2012)145_N 123.571,186.817 r90 top
C8 "470nF" CAPC0805(2012)100_N 119.634,181.991 r180 bottom
C9 "470nF" CAPC0805(2012)100_N 115.602,181.991 r180 bottom
C10 "100uF" CAPC1210(3225)280A_M 106.299,205.486 r0 top
C11 "4.7uF" CAPC0805(2012)145_N 111.569,181.991 r0 bottom
C12 "470nF" CAPC0805(2012)100_N 100.076,188.214 r90 bottom
C13 "470nF" CAPC0805(2012)100_N 100.076,183.896 r270 bottom
C14 "100uF" CAPC1210(3225)280A_M 128.143,187.071 r90 bottom
C15 "4.7uF" CAPC0805(2012)145_N 120.396,186.309 r90 bottom
C16 "470nF" CAPC0805(2012)100_N 120.396,190.627 r270 bottom
C17 "470nF" CAPC0805(2012)100_N 120.523,195.199 r90 bottom
C18 "470nF" CAPC0805(2012)100_N 120.396,199.898 r270 bottom
C19 "100uF" CAPC1210(3225)280A_M 116.205,204.851 r0 top
C20 "4.7uF" CAPC0805(2012)145_N 116.078,201.549 r180 bottom
C21 "470nF" CAPC0805(2012)100_N 111.887,201.549 r180 bottom
C22 "470nF" CAPC0805(2012)100_N 107.696,201.676 r180 bottom
C23 "100uF" CAPC1210(3225)280A_M 124.587,195.453 r90 top
C24 "4.7uF" CAPC0805(2012)145_N 102.997,201.93 r0 bottom
C25 "470nF" CAPC0805(2012)100_N 103.505,181.991 r0 bottom
C26 "470nF" CAPC0805(2012)100_N 107.537,181.991 r180 bottom
C27 "10uF" CAPC0805(2012)145_N 108.331,160.655 r180 bottom
C28 "10nF" CAPC0805(2012)75_N 103.505,157.226 r90 bottom
C29 "10nF" CAPC0805(2012)75_N 104.267,160.655 r180 bottom
C30 "10nF" CAPC0805(2012)75_N 112.141,160.655 r0 bottom
C31 "10uF" CAPC0805(2012)145_N 111.776,145.415 r0 bottom
C32 "100nF" CAPC0805(2012)100_M 107.865,145.415 r180 bottom
C33 "100nF" CAPC0805(2012)100_M 103.505,145.415 r180 bottom
C34 "100nF" CAPC0805(2012)100_M 116.586,145.415 r180 bottom
C35 "100nF" CAPC0805(2012)100_M 117.475,153.543 r90 bottom
C36 "100nF" CAPC0805(2012)100_M 117.475,158.242 r90 bottom
C37 "100nF" CAPC0805(2012)100_M 103.378,148.717 r270 bottom
C38 "100nF" CAPC0805(2012)100_M 103.378,153.162 r270 bottom
C39 "22pF" CAPC0805(2012)75_L 131.826,163.576 r0 bottom
C40 "22pF" CAPC0805(2012)75_L 131.826,158.877 r0 bottom
C41 "33pF" CAPC0805(2012)75_L 131.826,143.891 r180 bottom
C42 "33pF" CAPC0805(2012)75_L 131.826,138.557 r180 bottom
C43 "1uF" CAPC0805(2012)100_N 127.254,80.391 r90 bottom
C44 "1uF" CAPC0805(2012)100_N 122.174,80.264 r270 bottom
C45 "1uF" CAPC0805(2012)100_N 123.063,85.852 r0 bottom
C46 "Cap Pol2" CAP470uF 70.358,80.264 r0 top
C47 "Cap Pol2" CAP470uF 81.915,80.264 r0 top
C48 "Cap Pol2" CAP470uF 93.472,80.264 r0 top
C49 "10nF" CAPC0805(2012)75_N 89.154,124.795 r180 bottom
C50 "100nF" CAPC0805(2012)100_M 82.55,125.095 r180 bottom
C51 "10nF" CAPC0805(2012)75_N 91.44,115.57 r90 bottom
C52 "10nF" CAPC0805(2012)75_N 63.627,207.518 r180 bottom
C53 "10nF" CAPC0805(2012)75_N 63.627,198.247 r0 bottom
C54 "10nF" CAPC0805(2012)75_N 63.627,187.325 r0 bottom
C55 "10nF" CAPC0805(2012)75_N 63.627,178.054 r0 bottom
C56 "10nF" CAPC0805(2012)75_N 63.627,168.656 r0 bottom
C57 "10nF" CAPC0805(2012)75_N 63.627,159.639 r0 bottom
C58 "10nF" CAPC0805(2012)75_N 63.627,150.114 r0 bottom
C59 "150pF" CAPC0805(2012)75_M 164.719,105.029 r0 top
C60 "10uF" CAPC0805(2012)145_L 160.655,92.075 r90 top
C61 "680pF" CAPC0805(2012)100_M 155.321,132.715 r0 top
C62 "150pF" CAPC0805(2012)75_M 150.241,126.399 r90 top
C63 "10uF" CAPC0805(2012)145_L 150.114,79.282 r180 top
C64 "680pF" CAPC0805(2012)100_M 157.734,84.455 r180 top
C65 "10nF" CAPC0805(2012)75_N 100.33,211.582 r270 bottom
CG1 "TXC-7W" TXC-7W 137.287,195.834 r270 top
FB1 "Inductor" INDC3216 92.837,97.126 r0 top
FB2 "BLM21B102S or similar" RESC3216N 122.555,146.812 r0 bottom
FB3 "Inductor" INDC3216 68.834,103.886 r180 bottom
FPGA "XC6SLX45-2CSG324I" CSG324 110.236,192.024 r0 top
FPGA_CLK "Header 3" HDR1X3 148.209,190.373 r90 top
FPGA_FLASH "TSOP65P640X119-20N" TSOP65P640X119-20N 109.855,217.551 r90 top
FPGA_GPIO "Header 6X2" HDR2X6 57.404,216.916 r0 top
FPGA_PROG "Header 7X2" HDR2X7 83.566,216.916 r0 top
GG "EFM32GG990F1024-BGA112" ENMR-BGA112 110.363,153.924 r0 top
GND "Socket" PIN1 139.446,80.01 r0 top
GPIO "Header 5X2" HDR2X5 147.574,148.209 r90 top
L1 "Inductor" "Coil DRA74-6R8-R" 66.167,97.409 r0 top
LED1 "Green" LED-0805-K 101.219,89.154 r270 top
LED2 "Red" LED-0805-A 78.867,107.442 r180 top
LED3 "Red" LED-0805-A 86.614,107.442 r180 top
LED4 "Green" LED-0805-K 71.628,207.518 r180 top
LED5 "Green" LED-0805-K 71.628,198.882 r180 top
LED6 "Green" LED-0805-K 71.628,187.198 r180 top
LED7 "Green" LED-0805-K 71.628,178.054 r180 top
LED8 "Green" LED-0805-K 71.628,169.037 r180 top
LED9 "Green" LED-0805-K 71.628,159.258 r180 top
LED10 "Green" LED-0805-K 71.628,150.114 r180 top
MJ1 "Minijack" MINIJACKS 168.148,130.556 r90 top
MJ2 "Minijack" MINIJACKS 168.148,117.729 r90 top
OA1 "TLV2471IDBVT" TLV2471IDBVT 156.845,105.918 r270 top
OA2 "TLV2471IDBVT" TLV2471IDBVT 151.003,114.461 r90 top
P1 "Header 2" HDR1X2 101.981,79.375 r90 top
P2 "Header 2" HDR1X2 105.759,79.375 r90 top
P3 "Header 3" HDR1X3 109.537,79.375 r90 top
P4 "Header 3" HDR1X3 113.316,79.375 r90 top
P5 "Header 3" HDR1X3 117.094,79.375 r90 top
P6 "Header 4" HDR1X4 66.294,130.81 r90 top
PWR "DC10B" DC-10B 57.277,85.344 r90 top
PWR12 "Socket" PIN1 130.81,80.01 r0 top
PWR18 "Socket" PIN1 139.446,87.884 r0 top
PWR33 "Socket" PIN1 130.81,87.884 r0 top
PWR_SRC "Header 3" HDR1X3 58.928,98.933 r180 top
R1 "1.00 Ohm" RESC0805(2012)_L 122.428,142.367 r180 bottom
R2 "10R 5% 0805(2012)" RESC0805(2012)_L 115.509,89.973 r180 bottom
R3 "330.00 Ohm" RESC0805(2012)_M 100.076,96.901 r180 top
R4 "10R 5% 0805(2012)" RESC0805(2012)_L 110.429,89.973 r0 bottom
R5 "330.00 Ohm" RESC0805(2012)_M 74.422,116.84 r0 bottom
R6 "330.00 Ohm" RESC0805(2012)_M 74.422,111.379 r0 bottom
R7 "100K" RESC0805(2012)_L 91.69,109.347 r270 bottom
R8 "100.00 Ohm" RESC0805(2012)_M 73.787,123.825 r270 bottom
R9 "100K" RESC0805(2012)_L 67.564,207.518 r0 bottom
R10 "100K" RESC0805(2012)_L 67.564,198.12 r0 bottom
R11 "100.00 Ohm" RESC0805(2012)_M 59.182,207.518 r0 bottom
R12 "330.00 Ohm" RESC0805(2012)_M 76.835,208.026 r180 bottom
R13 "330.00 Ohm" RESC0805(2012)_M 76.835,198.755 r180 bottom
R14 "100.00 Ohm" RESC0805(2012)_M 59.182,198.247 r0 bottom
R15 "100K" RESC0805(2012)_L 67.437,187.325 r0 bottom
R16 "100K" RESC0805(2012)_L 67.564,178.054 r0 bottom
R17 "100K" RESC0805(2012)_L 67.564,168.656 r0 bottom
R18 "100K" RESC0805(2012)_L 67.564,159.131 r0 bottom
R19 "100K" RESC0805(2012)_L 67.564,150.114 r0 bottom
R20 "100.00 Ohm" RESC0805(2012)_M 58.801,187.325 r0 bottom
R21 "100.00 Ohm" RESC0805(2012)_M 58.674,177.927 r0 bottom
R22 "100.00 Ohm" RESC0805(2012)_M 58.674,168.402 r0 bottom
R23 "100.00 Ohm" RESC0805(2012)_M 58.674,159.385 r0 bottom
R24 "100.00 Ohm" RESC0805(2012)_M 58.674,150.241 r0 bottom
R25 "330.00 Ohm" RESC0805(2012)_M 76.835,187.071 r180 bottom
R26 "330.00 Ohm" RESC0805(2012)_M 76.835,178.054 r0 bottom
R27 "330.00 Ohm" RESC0805(2012)_M 76.835,168.783 r180 bottom
R28 "330.00 Ohm" RESC0805(2012)_M 76.835,159.258 r0 bottom
R29 "330.00 Ohm" RESC0805(2012)_M 76.835,149.86 r0 bottom
R30 "15000.00 Ohm" RESC0805(2012)_M 157.607,99.822 r180 top
R31 "1000.00 Ohm" RESC0805(2012)_M 164.846,100.076 r0 top
R32 "1000.00 Ohm" RESC0805(2012)_M 164.465,94.488 r0 top
R33 "15000.00 Ohm" RESC0805(2012)_M 164.719,89.662 r0 top
R34 "27000.00 Ohm" RESC0805(2012)_M 164.719,83.82 r0 top
R35 "22000.00 Ohm" RESC0805(2012)_M 164.973,78.867 r0 top
R36 "47000.00 Ohm" RESC0805(2012)_M 157.988,79.248 r0 top
R37 "47000.00 Ohm" RESC0805(2012)_M 163.703,109.093 r90 top
R38 "15000.00 Ohm" RESC0805(2012)_M 150.241,132.241 r90 top
R39 "1000.00 Ohm" RESC0805(2012)_M 150.241,120.557 r90 top
R40 "1000.00 Ohm" RESC0805(2012)_M 149.987,86.521 r90 top
R41 "15000.00 Ohm" RESC0805(2012)_M 149.987,92.363 r90 top
R42 "27000.00 Ohm" RESC0805(2012)_M 149.987,98.078 r90 top
R43 "22000.00 Ohm" RESC0805(2012)_M 150.241,108.873 r90 top
R44 "4K7" RESC0805(2012)_M 115.316,217.551 r270 bottom
R45 "330.00 Ohm" RESC0805(2012)_M 120.269,217.551 r270 bottom
R46 "100K" RESC0805(2012)_L 104.521,217.678 r90 bottom
R47 "100K" RESC0805(2012)_L 104.521,211.932 r90 bottom
R48 "100.00 Ohm" RESC0805(2012)_M 90.297,208.661 r0 bottom
S1 "ZXCT1021" SOT95P270X145-5N 110.429,91.243 r270 top
S2 "ZXCT1021" SOT95P270X145-5N 115.509,91.243 r270 top
SD "MICROSD-SPI" MICROSD_WR-CRD 56.261,122.936 r90 top
SNS33 "Socket" PIN1 106.553,94.107 r0 top
SNS_GGFP "Socket" PIN1 115.316,97.79 r0 top
SRAM "CY7C1061AV33" CY7C1061AV33 110.744,122.174 r90 top
U1 "AP7312" SOT95P285X145-6N 123.19,80.391 r0 top
U2 "SR10S3V3" SR10S3V3_Footprint 80.01,100.711 r0 top
U3 "FT232RL-Reel" SSOP-28_N 82.804,117.729 r0 top
USB "MICRO_USB_AB" MICRO_USB_AB 57.658,137.541 r0 top
X1 "32.768kHz" MC-306 132.969,158.623 r90 top
X2 "TXC-7B" TXC-7B 133.35,143.129 r180 top

## Footprints (in the part's own frame and the unit in brackets; to place one, negate y for a bottom-side part, rotate by r counter-clockwise, add the part's x,y. Pads: shape width x height; smd on the part's side, far side on the other; paste and mask are expansions set on the pad)
BUTTON [mm]
  rect 1.4x2.1 smd: 1(0,0) 2(0,-9.1) 3(-4.5,-9.1) 4(-4.5,0)
  silkscreen extent -5.3,-7.7 0.8,-1.3
CAP470uF [mm]
  rect 1.8x4 smd: 1(0,8.1) 2(0,0)
  silkscreen extent -5.21,-2.35 5.19,10.33
CAPC0805(2012)75_L [mm] "Chip Capacitor, Body 2.0x1.2mm, Height 0.75mm, IPC High Density"
  rect 0.95x1.35 smd: 1(-0.8,0) 2(0.8,0)
  silkscreen extent -0.05,-0.58 0.05,0.58, body extent -1.1,-0.72 1.1,0.72, height 0.75
CAPC0805(2012)75_M [mm] "Chip Capacitor, Body 2.0x1.2mm, Height 0.75mm, IPC Low Density"
  rect 1.35x1.55 smd: 1(-1,0) 2(1,0)
  silkscreen extent -0.05,-0.67 0.05,0.67, body extent -1.1,-0.72 1.1,0.72, height 0.75
CAPC0805(2012)75_N [mm] "Chip Capacitor, Body 2.0x1.2mm, Height 0.75mm, IPC Medium Density"
  rect 1.15x1.45 smd: 1(-0.9,0) 2(0.9,0)
  silkscreen extent -0.05,-0.62 0.05,0.62, body extent -1.1,-0.72 1.1,0.73, height 0.75
CAPC0805(2012)100_M [mm] "Chip Capacitor, Body 2.0x1.2mm, Height 1.0mm, IPC Low Density"
  rect 1.35x1.55 smd: 1(-1,0) 2(1,0)
  silkscreen extent -0.05,-0.67 0.05,0.67, body extent -1.1,-0.72 1.1,0.72, height 1
CAPC0805(2012)100_N [mm] "Chip Capacitor, Body 2.0x1.2mm, Height 1.0mm, IPC Medium Density"
  rect 1.15x1.45 smd: 1(-0.9,0) 2(0.9,0)
  silkscreen extent -0.05,-0.62 0.05,0.62, body extent -1.1,-0.72 1.1,0.73, height 1
CAPC0805(2012)145_L [mm] "Chip Capacitor, Body 2.0x1.2mm, Height 1.45mm, IPC High Density"
  rect 0.95x1.35 smd: 1(-0.8,0) 2(0.8,0)
  silkscreen extent -0.05,-0.58 0.05,0.58, body extent -1.1,-0.72 1.1,0.72, height 1.45
CAPC0805(2012)145_N [mm] "Chip Capacitor, Body 2.0x1.2mm, Height 1.45mm, IPC Medium Density"
  rect 1.15x1.45 smd: 1(-0.9,0) 2(0.9,0)
  silkscreen extent -0.05,-0.62 0.05,0.62, body extent -1.1,-0.72 1.1,0.73, height 1.45
CAPC1210(3225)280A_M [mm] "Chip Capacitor, Body 3.2x2.5mm, Height 2.8mm, IPC Low Density"
  rect 1.6x2.8 smd: 1(-1.475,0) 2(1.475,0)
  silkscreen extent -0.3,-1.3 0.3,1.3, body extent -1.7,-1.4 1.7,1.4, height 2.8
"Coil DRA74-6R8-R" [mm]
  rect 2.5x3.25 smd: 1(0,0) 2(6,0)
  silkscreen extent -2,-2.5 8,2
CSG324 [mm] "BGA, 324-Leads, Body 15x15mm, Pitch 0.8mm"
  round 0.36 smd: A1(-6.8,6.8) A2(-6,6.8) A3(-5.2,6.8) A4(-4.4,6.8) A5(-3.6,6.8) A6(-2.8,6.8) A7(-2,6.8) A8(-1.2,6.8) A9(-0.4,6.8) A10(0.4,6.8) A11(1.2,6.8) A12(2,6.8) A13(2.8,6.8) A14(3.6,6.8) A15(4.4,6.8) A16(5.2,6.8) A17(6,6.8) A18(6.8,6.8) B1(-6.8,6) B2(-6,6) B3(-5.2,6) B4(-4.4,6) B5(-3.6,6) B6(-2.8,6) B7(-2,6) B8(-1.2,6) B9(-0.4,6) B10(0.4,6) B11(1.2,6) B12(2,6) B13(2.8,6) B14(3.6,6) B15(4.4,6) B16(5.2,6) B17(6,6) B18(6.8,6) C1(-6.8,5.2) C2(-6,5.2) C3(-5.2,5.2) C4(-4.4,5.2) C5(-3.6,5.2) C6(-2.8,5.2) C7(-2,5.2) C8(-1.2,5.2) C9(-0.4,5.2) C10(0.4,5.2) C11(1.2,5.2) C12(2,5.2) C13(2.8,5.2) C14(3.6,5.2) C15(4.4,5.2) C16(5.2,5.2) C17(6,5.2) C18(6.8,5.2) D1(-6.8,4.4) D2(-6,4.4) D3(-5.2,4.4) D4(-4.4,4.4) D5(-3.6,4.4) D6(-2.8,4.4) D7(-2,4.4) D8(-1.2,4.4) D9(-0.4,4.4) D10(0.4,4.4) D11(1.2,4.4) D12(2,4.4) D13(2.8,4.4) D14(3.6,4.4) D15(4.4,4.4) D16(5.2,4.4) D17(6,4.4) D18(6.8,4.4) E1(-6.8,3.6) E2(-6,3.6) E3(-5.2,3.6) E4(-4.4,3.6) E5(-3.6,3.6) E6(-2.8,3.6) E7(-2,3.6) E8(-1.2,3.6) E9(-0.4,3.6) E10(0.4,3.6) E11(1.2,3.6) E12(2,3.6) E13(2.8,3.6) E14(3.6,3.6) E15(4.4,3.6) E16(5.2,3.6) E17(6,3.6) E18(6.8,3.6) F1(-6.8,2.8) F2(-6,2.8) F3(-5.2,2.8) F4(-4.4,2.8) F5(-3.6,2.8) F6(-2.8,2.8) F7(-2,2.8) F8(-1.2,2.8) F9(-0.4,2.8) F10(0.4,2.8) F11(1.2,2.8) F12(2,2.8) F13(2.8,2.8) F14(3.6,2.8) F15(4.4,2.8) F16(5.2,2.8) F17(6,2.8) F18(6.8,2.8) G1(-6.8,2) G2(-6,2) G3(-5.2,2) G4(-4.4,2) G5(-3.6,2) G6(-2.8,2) G7(-2,2) G8(-1.2,2) G9(-0.4,2) G10(0.4,2) G11(1.2,2) G12(2,2) G13(2.8,2) G14(3.6,2) G15(4.4,2) G16(5.2,2) G17(6,2) G18(6.8,2) H1(-6.8,1.2) H2(-6,1.2) H3(-5.2,1.2) H4(-4.4,1.2) H5(-3.6,1.2) H6(-2.8,1.2) H7(-2,1.2) H8(-1.2,1.2) H9(-0.4,1.2) H10(0.4,1.2) H11(1.2,1.2) H12(2,1.2) H13(2.8,1.2) H14(3.6,1.2) H15(4.4,1.2) H16(5.2,1.2) H17(6,1.2) H18(6.8,1.2) J1(-6.8,0.4) J2(-6,0.4) J3(-5.2,0.4) J4(-4.4,0.4) J5(-3.6,0.4) J6(-2.8,0.4) J7(-2,0.4) J8(-1.2,0.4) J9(-0.4,0.4) J10(0.4,0.4) J11(1.2,0.4) J12(2,0.4) J13(2.8,0.4) J14(3.6,0.4) J15(4.4,0.4) J16(5.2,0.4) J17(6,0.4) J18(6.8,0.4) K1(-6.8,-0.4) K2(-6,-0.4) K3(-5.2,-0.4) K4(-4.4,-0.4) K5(-3.6,-0.4) K6(-2.8,-0.4) K7(-2,-0.4) K8(-1.2,-0.4) K9(-0.4,-0.4) K10(0.4,-0.4) K11(1.2,-0.4) K12(2,-0.4) K13(2.8,-0.4) K14(3.6,-0.4) K15(4.4,-0.4) K16(5.2,-0.4) K17(6,-0.4) K18(6.8,-0.4) L1(-6.8,-1.2) L2(-6,-1.2) L3(-5.2,-1.2) L4(-4.4,-1.2) L5(-3.6,-1.2) L6(-2.8,-1.2) L7(-2,-1.2) L8(-1.2,-1.2) L9(-0.4,-1.2) L10(0.4,-1.2) L11(1.2,-1.2) L12(2,-1.2) L13(2.8,-1.2) L14(3.6,-1.2) L15(4.4,-1.2) L16(5.2,-1.2) L17(6,-1.2) L18(6.8,-1.2) M1(-6.8,-2) M2(-6,-2) M3(-5.2,-2) M4(-4.4,-2) M5(-3.6,-2) M6(-2.8,-2) M7(-2,-2) M8(-1.2,-2) M9(-0.4,-2) M10(0.4,-2) M11(1.2,-2) M12(2,-2) M13(2.8,-2) M14(3.6,-2) M15(4.4,-2) M16(5.2,-2) M17(6,-2) M18(6.8,-2) N1(-6.8,-2.8) N2(-6,-2.8) N3(-5.2,-2.8) N4(-4.4,-2.8) N5(-3.6,-2.8) N6(-2.8,-2.8) N7(-2,-2.8) N8(-1.2,-2.8) N9(-0.4,-2.8) N10(0.4,-2.8) N11(1.2,-2.8) N12(2,-2.8) N13(2.8,-2.8) N14(3.6,-2.8) N15(4.4,-2.8) N16(5.2,-2.8) N17(6,-2.8) N18(6.8,-2.8) P1(-6.8,-3.6) P2(-6,-3.6) P3(-5.2,-3.6) P4(-4.4,-3.6) P5(-3.6,-3.6) P6(-2.8,-3.6) P7(-2,-3.6) P8(-1.2,-3.6) P9(-0.4,-3.6) P10(0.4,-3.6) P11(1.2,-3.6) P12(2,-3.6) P13(2.8,-3.6) P14(3.6,-3.6) P15(4.4,-3.6) P16(5.2,-3.6) P17(6,-3.6) P18(6.8,-3.6) R1(-6.8,-4.4) R2(-6,-4.4) R3(-5.2,-4.4) R4(-4.4,-4.4) R5(-3.6,-4.4) R6(-2.8,-4.4) R7(-2,-4.4) R8(-1.2,-4.4) R9(-0.4,-4.4) R10(0.4,-4.4) R11(1.2,-4.4) R12(2,-4.4) R13(2.8,-4.4) R14(3.6,-4.4) R15(4.4,-4.4) R16(5.2,-4.4) R17(6,-4.4) R18(6.8,-4.4) T1(-6.8,-5.2) T2(-6,-5.2) T3(-5.2,-5.2) T4(-4.4,-5.2) T5(-3.6,-5.2) T6(-2.8,-5.2) T7(-2,-5.2) T8(-1.2,-5.2) T9(-0.4,-5.2) T10(0.4,-5.2) T11(1.2,-5.2) T12(2,-5.2) T13(2.8,-5.2) T14(3.6,-5.2) T15(4.4,-5.2) T16(5.2,-5.2) T17(6,-5.2) T18(6.8,-5.2) U1(-6.8,-6) U2(-6,-6) U3(-5.2,-6) U4(-4.4,-6) U5(-3.6,-6) U6(-2.8,-6) U7(-2,-6) U8(-1.2,-6) U9(-0.4,-6) U10(0.4,-6) U11(1.2,-6) U12(2,-6) U13(2.8,-6) U14(3.6,-6) U15(4.4,-6) U16(5.2,-6) U17(6,-6) U18(6.8,-6) V1(-6.8,-6.8) V2(-6,-6.8) V3(-5.2,-6.8) V4(-4.4,-6.8) V5(-3.6,-6.8) V6(-2.8,-6.8) V7(-2,-6.8) V8(-1.2,-6.8) V9(-0.4,-6.8) V10(0.4,-6.8) V11(1.2,-6.8) V12(2,-6.8) V13(2.8,-6.8) V14(3.6,-6.8) V15(4.4,-6.8) V16(5.2,-6.8) V17(6,-6.8) V18(6.8,-6.8)
  silkscreen extent -8.27,-7.5 7.5,7.5, body extent -7.5,-7.5 7.5,7.5, height 1.5
CY7C1061AV33 [mm] "TSOP, 54-Leads, Body 22,41x10,16mm, Pitch 0,80mm, IPC Medium Density"
  oval 1.45x0.5 smd: 1(-5.65,10.4) 2(-5.65,9.6) 3(-5.65,8.8) 4(-5.65,8) 5(-5.65,7.2) 6(-5.65,6.4) 7(-5.65,5.6) 8(-5.65,4.8) 9(-5.65,4) 10(-5.65,3.2) 11(-5.65,2.4) 12(-5.65,1.6) 13(-5.65,0.8) 14(-5.65,0) 15(-5.65,-0.8) 16(-5.65,-1.6) 17(-5.65,-2.4) 18(-5.65,-3.2) 19(-5.65,-4) 20(-5.65,-4.8) 21(-5.65,-5.6) 22(-5.65,-6.4) 23(-5.65,-7.2) 24(-5.65,-8) 25(-5.65,-8.8) 26(-5.65,-9.6) 27(-5.65,-10.4) 28(5.65,-10.4) 29(5.65,-9.6) 30(5.65,-8.8) 31(5.65,-8) 32(5.65,-7.2) 33(5.65,-6.4) 34(5.65,-5.6) 35(5.65,-4.8) 36(5.65,-4) 37(5.65,-3.2) 38(5.65,-2.4) 39(5.65,-1.6) 40(5.65,-0.8) 41(5.65,0) 42(5.65,0.8) 43(5.65,1.6) 44(5.65,2.4) 45(5.65,3.2) 46(5.65,4) 47(5.65,4.8) 48(5.65,5.6) 49(5.65,6.4) 50(5.65,7.2) 51(5.65,8) 52(5.65,8.8) 53(5.65,9.6) 54(5.65,10.4)
  silkscreen extent -5.77,-11.25 4.53,11.32, body extent -5.15,-11.25 5.15,11.25, height 1.2
DC-10B [mil]
  oval 60x170 hole 30 slot 140 at 90 deg: 1(244.09,0)
  oval 160x60 hole 30 slot 130 at 0 deg: 2(122.05,-196.85)
  oval 60x160 hole 30 slot 130 at 90 deg: 3(0,0)
  silkscreen extent -295,-200 245,197
ENMR-BGA112 [mm] "BGA, 112-Balls, Body 10x10mm, Pitch 0.8mm"
  round 0.45 smd: A1(-4,4) A2(-3.2,4) A3(-2.4,4) A4(-1.6,4) A5(-0.8,4) A6(0,4) A7(0.8,4) A8(1.6,4) A9(2.4,4) A10(3.2,4) A11(4,4) B1(-4,3.2) B2(-3.2,3.2) B3(-2.4,3.2) B4(-1.6,3.2) B5(-0.8,3.2) B6(0,3.2) B7(0.8,3.2) B8(1.6,3.2) B9(2.4,3.2) B10(3.2,3.2) B11(4,3.2) C1(-4,2.4) C2(-3.2,2.4) C3(-2.4,2.4) C4(-1.6,2.4) C5(-0.8,2.4) C6(0,2.4) C7(0.8,2.4) C8(1.6,2.4) C9(2.4,2.4) C10(3.2,2.4) C11(4,2.4) D1(-4,1.6) D2(-3.2,1.6) D3(-2.4,1.6) D4(-1.6,1.6) D5(-0.8,1.6) D6(0,1.6) D7(0.8,1.6) D8(1.6,1.6) D9(2.4,1.6) D10(3.2,1.6) D11(4,1.6) E1(-4,0.8) E2(-3.2,0.8) E3(-2.4,0.8) E4(-1.6,0.8) E5(-0.8,0.8) E6(0,0.8) E7(0.8,0.8) E8(1.6,0.8) E9(2.4,0.8) E10(3.2,0.8) E11(4,0.8) F1(-4,0) F2(-3.2,0) F3(-2.4,0) F4(-1.6,0) F5(-0.8,0) F6(0,0) F7(0.8,0) F8(1.6,0) F9(2.4,0) F10(3.2,0) F11(4,0) G1(-4,-0.8) G2(-3.2,-0.8) G3(-2.4,-0.8) G4(-1.6,-0.8) G5(-0.8,-0.8) G6(0,-0.8) G7(0.8,-0.8) G8(1.6,-0.8) G9(2.4,-0.8) G10(3.2,-0.8) G11(4,-0.8) H1(-4,-1.6) H2(-3.2,-1.6) H3(-2.4,-1.6) H4(-1.6,-1.6) H5(-0.8,-1.6) H6(0,-1.6) H7(0.8,-1.6) H8(1.6,-1.6) H9(2.4,-1.6) H10(3.2,-1.6) H11(4,-1.6) J1(-4,-2.4) J2(-3.2,-2.4) J3(-2.4,-2.4) J4(-1.6,-2.4) J5(-0.8,-2.4) J6(0,-2.4) J7(0.8,-2.4) J8(1.6,-2.4) J9(2.4,-2.4) J10(3.2,-2.4) J11(4,-2.4) K1(-4,-3.2) K2(-3.2,-3.2) K3(-2.4,-3.2) K4(-1.6,-3.2) K5(-0.8,-3.2) K6(0,-3.2) K7(0.8,-3.2) K8(1.6,-3.2) K9(2.4,-3.2) K10(3.2,-3.2) K11(4,-3.2) L1(-4,-4) L2(-3.2,-4) L3(-2.4,-4) L4(-1.6,-4) L5(-0.8,-4) L6(0,-4) L7(0.8,-4) L8(1.6,-4) L9(2.4,-4) L10(3.2,-4) L11(4,-4)
  silkscreen extent -5.77,-5 5,5, body extent -5,-5 5,5, height 1.3
HDR1X2 [mm] "Connector; Header; 2 Position"
  rect 1.5x1.5 hole 0.9: 1(0,0)
  round 1.5 hole 0.9: 2(2.54,0)
  silkscreen extent -1.27,-1.27 3.81,1.27
HDR1X3 [mm] "Connector; Header; 3 Position"
  rect 1.5x1.5 hole 0.9: 1(0,0)
  round 1.5 hole 0.9: 2(2.54,0) 3(5.08,0)
  silkscreen extent -1.27,-1.27 6.35,1.27
HDR1X4 [mm] "Connector; Header; 4 Position"
  rect 1.5x1.5 hole 0.9: 1(0,0)
  round 1.5 hole 0.9: 2(2.54,0) 3(5.08,0) 4(7.62,0)
  silkscreen extent -1.27,-1.27 8.89,1.27
HDR2X5 [mm] "Connector; Header; 5x2 Position"
  rect 1.5x1.5 hole 0.9: 1(0,0)
  round 1.5 hole 0.9: 2(0,2.54) 3(2.54,0) 4(2.54,2.54) 5(5.08,0) 6(5.08,2.54) 7(7.62,0) 8(7.62,2.54) 9(10.16,0) 10(10.16,2.54)
  silkscreen extent -1.27,-1.27 11.43,3.81
HDR2X6 [mm] "Connector; Header; 6x2 Position"
  rect 1.5x1.5 hole 0.9: 1(0,0)
  round 1.5 hole 0.9: 2(0,2.54) 3(2.54,0) 4(2.54,2.54) 5(5.08,0) 6(5.08,2.54) 7(7.62,0) 8(7.62,2.54) 9(10.16,0) 10(10.16,2.54) 11(12.7,0) 12(12.7,2.54)
  silkscreen extent -1.27,-1.27 13.97,3.81
HDR2X7 [mm] "Connector; Header; 7x2 Position"
  rect 1.5x1.5 hole 0.9: 1(0,0)
  round 1.5 hole 0.9: 2(0,2.54) 3(2.54,0) 4(2.54,2.54) 5(5.08,0) 6(5.08,2.54) 7(7.62,0) 8(7.62,2.54) 9(10.16,0) 10(10.16,2.54) 11(12.7,0) 12(12.7,2.54) 13(15.24,0) 14(15.24,2.54)
  silkscreen extent -1.27,-1.27 16.51,3.81
HDR2X10 [mm] "Connector; Header; 10x2 Position"
  rect 1.5x1.5 hole 0.9: 1(0,0)
  round 1.5 hole 0.9: 2(0,2.54) 3(2.54,0) 4(2.54,2.54) 5(5.08,0) 6(5.08,2.54) 7(7.62,0) 8(7.62,2.54) 9(10.16,0) 10(10.16,2.54) 11(12.7,0) 12(12.7,2.54) 13(15.24,0) 14(15.24,2.54) 15(17.78,0) 16(17.78,2.54) 17(20.32,0) 18(20.32,2.54) 19(22.86,0) 20(22.86,2.54)
  silkscreen extent -1.27,-1.27 24.13,3.81
INDC3216 [mm] "Chip Inductor, Body 3.2x1.6mm, IPC High Density"
  rect 1.1x1.8 smd: 1(-1.35,0) 2(1.35,0)
  silkscreen extent -0.4,-0.8 0.4,0.8, body extent -1.7,-0.9 1.7,0.9, height 0.55
LED-0805-A [mil]
  round 20 on Mech14: 0(0,0)
  rrect25% 50x50 smd: A(-37.5,0) K(37.5,0)
  Top Layer pour cut-out: -15,30 15,30 15,-30 -15,-30
  silkscreen extent -72,-35 77,35, body extent -39,-25 39,25, height 31
LED-0805-K [mil]
  round 20 on Mech14: 0(0,0)
  rrect25% 50x50 smd: A(-37.5,0) K(37.5,0)
  Top Layer pour cut-out: -15,30 15,30 15,-30 -15,-30
  silkscreen extent -72,-35 77,35, body extent -39,-25 39,25, height 31
MC-306 [mm]
  rect 1.3x1.9 smd: 1(0,0) 2(5.5,0) 3(5.5,3.2) 4(0,3.2)
  silkscreen extent -0.92,-1.27 6.46,4.41
MICRO_USB_AB [mm] "Molex, Micro USB type AB 47589-0001"
  rect 1.35x0.4 smd: 1(-0.05,-0.925) 2(-0.05,-1.575) 3(-0.05,-2.225) 4(-0.05,-2.875) 5(-0.05,-3.525)
  rrect50% 1.9x2.1 hole 0.83 slot 1.5 at 0 deg unplated copper offset 0,0.435: ""(-3.18,-6.31)
  rrect50% 1.9x2.1 hole 0.83 slot 1.5 at 0 deg unplated copper offset 0,-0.435: ""(-3.18,1.86)
  rect 1.9x1.8 smd: ""(-3,-3.375) ""(-3,-1.075)
  oval 0.95x0.85 hole 0.75 slot 0.85 at 0 deg unplated: ""(0,-4.45) ""(0,0)
  silkscreen extent -4.98,-8.55 2.01,3.62
MICROSD_WR-CRD [mm] "Micro SD from Würth Electronics, WR-CRD"
  rect 0.8x1.5 smd: 1(-3.6,-9.55) 2(-4.7,-9.55) 3(-5.8,-9.55) 4(-6.9,-9.55) 5(-8,-9.55) 6(-9.1,-9.55) 7(-10.2,-9.55) 8(-11.3,-9.55)
  rect 1.45x2 smd: ""(-13.75,-12.15) ""(-13.75,-3.85) ""(0,-3.85) ""(0,-12.15)
  silkscreen extent -16.3,-14.7 2.05,3.45
MINIJACKS [mm]
  rect 1.5x1.5 smd: 1(0,0) 3(8.1,0)
  rect 1.5x2 smd: 2(0,8.85) 2(8.1,8.8)
  silkscreen extent -0.9,1.1 9,7.5
PIN1 [mm] "Connector; Plug"
  rect 1.5x1.5 hole 0.9: 1(0,0)
  silkscreen extent -1.4,-1.4 1.4,2.17
RESC0805(2012)_L [mm] "Chip Resistor, Body 2.0x1.3mm, IPC High Density"
  rect 0.85x1.3 smd: 1(-0.85,0) 2(0.85,0)
  silkscreen extent -0.05,-0.55 0.05,0.55, body extent -1.1,-0.67 1.1,0.68, height 0.7
RESC0805(2012)_M [mm] "Chip Resistor, Body 2.0x1.3mm, IPC Low Density"
  rect 1.25x1.5 smd: 1(-1.05,0) 2(1.05,0)
  silkscreen extent -0.05,-0.65 0.05,0.65, body extent -1.1,-0.67 1.1,0.67, height 0.7
RESC3216N [mm] "Chip Resistor, Body 3.2x1.6mm, 1206, IPC Medium Density"
  round 0.508 on Mech14: 0(0,0)
  rrect25% 1.3x1.8 smd: 1(-1.45,0) 2(1.45,0)
  silkscreen extent -0.51,-0.89 0.51,0.89, body extent -1.62,-0.82 1.63,0.83, height 0.69
SOT95P270X145-5N [mm] "SOT23, 5-Leads, Body 2,90x2,70mm, Pitch 0,95mm, IPC Medium Density"
  rect 1.1x0.6 smd: 1(-1.2,0.95) 2(-1.2,0) 3(-1.2,-0.95) 4(1.2,-0.95) 5(1.2,0.95)
  silkscreen extent -1.32,-1.55 0.25,1.93, body extent -0.9,-1.55 0.9,1.55, height 1.45
SOT95P285X145-6N [mm] "SOT23, 6-Leads, Body 3,00x2,85mm, Pitch 0,95mm, IPC Medium Density"
  rect 1.05x0.6 smd: 1(-1.225,0.95) 2(-1.225,0) 3(-1.225,-0.95) 4(1.225,-0.95) 5(1.225,0) 6(1.225,0.95)
  silkscreen extent -1.35,-1.55 0.3,1.92, body extent -0.85,-1.55 0.85,1.55, height 1.45
SR10S3V3_Footprint [mm]
  rect 0.5x0.25 hole 0.7: 1(0,0) 2(2.54,0) 3(5.08,0)
  silkscreen extent -3.5,-6.06 8.21,2.01
SSOP-28_N [mm] "SOP, 28-Leads, Body 10.2x5.3mm, Pitch 0.65mm, IPC Medium Density"
  oval 2.1x0.35 smd: 1(-3.45,4.225) 2(-3.45,3.575) 3(-3.45,2.925) 4(-3.45,2.275) 5(-3.45,1.625) 6(-3.45,0.975) 7(-3.45,0.325) 8(-3.45,-0.325) 9(-3.45,-0.975) 10(-3.45,-1.625) 11(-3.45,-2.275) 12(-3.45,-2.925) 13(-3.45,-3.575) 14(-3.45,-4.225) 15(3.45,-4.225) 16(3.45,-3.575) 17(3.45,-2.925) 18(3.45,-2.275) 19(3.45,-1.625) 20(3.45,-0.975) 21(3.45,-0.325) 22(3.45,0.325) 23(3.45,0.975) 24(3.45,1.625) 25(3.45,2.275) 26(3.45,2.925) 27(3.45,3.575) 28(3.45,4.225)
  silkscreen extent -3.57,-5.25 2,5.25, body extent -2.8,-5.25 2.8,5.25, height 2
TLV2471IDBVT [mm] "SOT23, 5-Leads, Body 2,90x2,80mm, Pitch 0,95mm, IPC Medium Density"
  rect 1.1x0.6 smd: 1(-1.2,0.95) 2(-1.2,0) 3(-1.2,-0.95) 4(1.2,-0.95) 5(1.2,0.95)
  silkscreen extent -1.32,-1.55 0.25,1.93, body extent -0.87,-1.52 0.87,1.53, height 1.45
TSOP65P640X119-20N [mm] "TSOP, 20-Leads, Body 6,50x4,38mm, Pitch 0,65mm, IPC Medium Density"
  rect 1.7x0.35 smd: 1(-2.85,2.925) 2(-2.85,2.275) 3(-2.85,1.625) 4(-2.85,0.975) 5(-2.85,0.325) 6(-2.85,-0.325) 7(-2.85,-0.975) 8(-2.85,-1.625) 9(-2.85,-2.275) 10(-2.85,-2.925) 11(2.85,-2.925) 12(2.85,-2.275) 13(2.85,-1.625) 14(2.85,-0.975) 15(2.85,-0.325) 16(2.85,0.325) 17(2.85,0.975) 18(2.85,1.625) 19(2.85,2.275) 20(2.85,2.925)
  silkscreen extent -2.97,-3.3 1.6,3.77, body extent -2.25,-3.3 2.25,3.3, height 1.19
TXC-7B [mm]
  rect 2x1.2 smd: 1(0,0) 2(3.7,0) 3(3.7,2.2) 4(0,2.2)
  silkscreen extent -1.28,-0.87 4.98,3.09
TXC-7W [mm]
  rect 1.8x2 smd: 1(0,0) 2(5.08,0) 3(5.08,4.2) 4(0,4.2)
  silkscreen extent -1.22,-1.37 6.3,5.57

## Part data
1 3: library part CMP-1036-03801-1, "CAP 10nF 6.3V ±5% 0805 (2012 Metric) Thickness 1mm SMD"
2: library part CMP-1036-04390-1, "CAP 100nF 6.3V ±5% 0805 (2012 Metric) Thickness 1mm SMD"
ARM_PROG: "Header, 10-Pin, Dual row"
C1 C43 C44 C45: library part CMP-1036-04747-1, "CAP 1uF 16V ±10% 0805 (2012 Metric) Thickness 1mm SMD"
C2 C6 C10 C14 C19 C23: library part CMP-1038-02303-1, "CAP 100uF 6.3V ±20% 1210 (3225 Metric) Thickness 2.8mm SMD"
C3 C7 C11 C15 C20 C24: library part CMP-1036-04881-1, "CAP 4.7uF 10V ±10% 0805 (2012 Metric) Thickness 1.45mm SMD"
C4 C5 C8 C9 C12 C13 C16 C17 C18 C21 C22 C25 C26: library part CMP-1036-04639-1, "CAP 470nF 16V ±10% 0805 (2012 Metric) Thickness 1mm SMD"
C27 C31: library part CMP-1036-04932-1, "CAP 10uF 25V ±10% 0805 (2012 Metric) Thickness 1.45mm SMD"
C28 C29 C30 C49 C51 C52 C53 C54 C55 C56 C57 C58 C65: library part CMP-1036-03842-1, "CAP 10nF 50V ±10% 0805 (2012 Metric) Thickness 0.75mm SMD"
C32 C33 C34 C35 C36 C37 C38 C50: library part CMP-1036-04420-1, "CAP 100nF 50V ±10% 0805 (2012 Metric) Thickness 1mm SMD"
C39 C40: library part CMP-1036-01219-1, "CAP 22pF 16V ±5% 0805 (2012 Metric) Thickness 0.75mm SMD"
C41 C42: library part CMP-1036-01407-1, "CAP 33pF 16V ±5% 0805 (2012 Metric) Thickness 0.75mm SMD"
C46 C47 C48: "Polarized Capacitor (Axial)"
C59 C62: library part CMP-1036-02142-1, "CAP 150pF 100V ±1% 0805 (2012 Metric) Thickness 0.75mm SMD"
C60 C63: library part CMP-1036-04915-1, "CAP 10uF 6.3V ±10% 0805 (2012 Metric) Thickness 1.45mm SMD"
C61 C64: library part CMP-1036-02797-1, "CAP 680pF 6.3V ±5% 0805 (2012 Metric) Thickness 1mm SMD"
FB2: library part Inductor, "Inductor"
FPGA: "Spartan-6 LX 1.2V FPGA, 218 User I/Os, 324-Ball Chip-Scale BGA (0.8mm Pitch), Speed Grade 2, Industrial Grade, Pb-Free"
FPGA_CLK P3 P4 P5 PWR_SRC: "Header, 3-Pin"
FPGA_GPIO: "Header, 6-Pin, Dual row"
FPGA_PROG: "Header, 7-Pin, Dual row"
GG: "EFM32 Giant Gecko, M3 ARM Cortex CPU, 1024 KB Flash, 128 KB RAM, 1.85 - 3.8 V Supply, 48 MHz Max Speed, -40 to 85 degC, 112-Pin BGA, RoHS Compliant"
GPIO: "Header, 5-Pin, Dual row"
LED1 LED4 LED5 LED6 LED7 LED8 LED9 LED10: library part LED_SMD_Green_0805, "LED, 0805 SMD, Green"
LED2 LED3: library part LED_SMD_Red_0805, "LED, 0805 SMD, Red"
P1 P2: "Header, 2-Pin"
P6: "Header, 4-Pin"
R1: library part CMP-1013-00002-1, "1R 0.125W 5% 0805 (2012 Metric)  SMD"
R2 R4: library part CMP-1013-00026-1, "10R 0.125W 5% 0805 (2012 Metric)  SMD"
R3 R5 R6 R12 R13 R25 R26 R27 R28 R29 R45: library part CMP-1013-00454-1, "330R 0.125W 1% 0805 (2012 Metric)  SMD"
R7 R9 R10 R15 R16 R17 R18 R19 R46 R47: library part CMP-1013-00122-1, "100K 0.125W 5% 0805 (2012 Metric)  SMD"
R8 R11 R14 R20 R21 R22 R23 R24 R48: library part CMP-1013-00050-1, "100R 0.125W 5% 0805 (2012 Metric)  SMD"
R30 R33 R38 R41: library part CMP-1013-00641-1, "15K 0.125W 1% 0805 (2012 Metric)  SMD"
R31 R32 R39 R40: library part CMP-1013-00510-1, "1K 0.125W 1% 0805 (2012 Metric)  SMD"
R34 R42: library part CMP-1013-00670-1, "27K 0.125W 1% 0805 (2012 Metric)  SMD"
R35 R43: library part CMP-1013-00659-1, "22K 0.125W 1% 0805 (2012 Metric)  SMD"
R36 R37: library part CMP-1013-00699-1, "47K 0.125W 1% 0805 (2012 Metric)  SMD"
R44: library part CMP-1013-00586-1, "4K7 0.125W 1% 0805 (2012 Metric)  SMD"
U3: "USB UART Asynchronous Serial Data Transfer Chip, SSOP-28, Tape and Reel"
X1: library part MC-306

## Via types
v1: diameter 0.4, hole 0.2, Top Layer to Bottom Layer, 576 vias

## Nets (pads, with @x,y where several pads share a name; then routed paths per layer and width w, separated by ;. In a path a pad name is that pad's centre, name@x,y a point inside that pad or via, vN(x,y) a via of type N, cw(c..) or ccw(c..) an arc to the next point about the centre after c; other vN are vias at no path point)
ARM_HFXTAL_N: C42.1 GG.L9 X2.3 | length 25.6
  Top Layer w0.1: GG.L9@112.763,149.924 114.732,147.955 v1(114.732,147.549) ; v1(127.635,140.929) X2.3@129.65,140.929 v1(131.674,140.929)
  MidLayer4 w0.1: v1(114.732,147.549) 117.411,147.549 117.872,147.088 121.476,147.088 v1(127.635,140.929)
  Bottom Layer w0.1: v1(131.674,140.929) 132.626,139.977 C42.1@132.626,138.557
ARM_HFXTAL_P: C41.1 GG.L8 X2.1 | length 28.8
  Top Layer w0.1: GG.L8@111.963,149.924 112.37,149.517 v1(112.37,148.233) ; X2.1@133.35,143.129 v1(134.65,143.129)
  MidLayer4 w0.1: v1(112.37,148.233) 117.425,148.233 118.217,147.442 118.723,147.442 118.854,147.573 130.206,147.573 v1@132.923,144.856 ; v1(132.893,144.856) v1@132.923,144.856 ; v1(134.65,143.129) v1@132.923,144.856
  Bottom Layer w0.1: C41.1@132.626,143.891 132.626,144.589 v1(132.893,144.856)
ARM_LFXTAL_N: C40.2 GG.L1 X1.1 | length 34.9
  Top Layer w0.1: v1(105.969,149.53) GG.L1@106.363,149.924 ; v1(132.893,159.842) 132.893,158.623 X1.1@132.969,158.623
  Mid-Layer 1 w0.1: v1(109.169,148.895) 113.767,148.895 114.757,149.885 115.265,149.885 115.722,150.343 v1(125.082,150.343)
  Mid-Layer 3 w0.1: v1(105.969,149.53) 106.35,149.911 108.153,149.911 v1(109.169,148.895)
  Bottom Layer w0.1: v1(125.082,150.343) 132.626,157.886 C40.2@132.626,158.877 132.626,159.575 v1(132.893,159.842)
ARM_LFXTAL_P: C39.2 GG.K1 X1.2 | length 83.6
  Top Layer w0.1: GG.K1@106.363,150.724 105.615,149.976 105.615,149.325 108.636,146.304 110.795,146.304 111.201,146.71 v1(111.201,148.514) ; v1(132.613,162.611) 134.112,164.109 134.098,164.123 X1.2@132.969,164.123
  MidLayer4 w0.1: v1(111.201,148.514) 111.76,149.073 118.669,149.073 119.761,147.98 137.338,147.98 138.176,147.142 148.539,147.142 148.641,147.244 148.641,159.36 146.863,161.138 v1(132.626,161.138)
  Bottom Layer w0.1: v1(132.613,162.611) v1@132.626,162.623 ; v1(132.626,161.138) v1@132.626,162.623 ; C39.2@132.626,163.576 v1@132.626,162.623
CTRL_BUS0: FPGA.B8 GG.A8 | length 43.1
  Top Layer w0.1: v1(108.712,198.425) 108.712,198.348 FPGA.B8@109.036,198.024 ; GG.A8@111.963,157.924 v1(112.37,158.331)
  Mid-Layer 2 w0.1: v1(108.712,198.425) 108.28,197.993 108.28,180.772 112.37,176.682 v1(112.37,158.331)
CTRL_BUS1: FPGA.A8 GG.H1 | length 53.9
  Top Layer w0.1: v1(105.994,151.917) 106.197,152.121 106.363,152.121 GG.H1@106.363,152.324 ; v1(108.636,199.371) 108.636,199.224 FPGA.A8@109.036,198.824
  Bottom Layer w0.1: v1(105.994,151.917) 106.324,152.248 106.324,156.058 106.629,156.362 107.01,156.362 107.112,156.464 107.112,157.709 106.883,157.937 106.477,157.937 105.994,158.42 105.994,159.182 106.07,159.258 106.07,177.876 105.74,178.206 105.74,182.702 104.369,184.074 104.369,186.944 105.791,188.366 105.791,198.545 106.07,198.824 108.089,198.824 v1(108.636,199.371)
CTRL_BUS2: FPGA.D9 GG.J1 | length 49.8
  Top Layer w0.1: v1(105.969,151.13) GG.J1@106.363,151.524 ; v1(109.442,196.818) FPGA.D9@109.836,196.424
  Mid-Layer 3 w0.1: v1(105.969,151.13) 105.207,151.892 105.207,154.204 104.165,155.245 104.165,167.792 109.194,172.821 109.194,181.19 109.068,181.316 109.068,196.444 v1(109.442,196.818)
EBI_A0: FPGA.F15 GG.J4 | length 51.1
  Top Layer w0.1: v1(108.356,151.13) 108.369,151.13 GG.J4@108.763,151.524 ; FPGA.F15@114.636,194.824 v1(115.037,195.224)
  Bottom Layer w0.1: v1(108.356,151.13) 108.763,151.536 108.763,153.06 109.601,153.899 109.601,157.683 110.084,158.166 110.592,158.166 112.141,159.715 112.141,161.874 109.779,164.236 109.779,182.88 111.481,184.582 111.481,190.83 112.674,192.024 114.198,192.024 114.681,192.507 114.681,194.869 v1(115.037,195.224)
EBI_A1: FPGA.F16 GG.K3 | length 53.1
  Top Layer w0.1: v1(107.569,150.317) 107.569,150.33 GG.K3@107.963,150.724 ; FPGA.F16@115.436,194.824 v1(115.824,195.212)
  Bottom Layer w0.1: v1(107.569,150.317) 108.001,150.749 108.001,158.979 108.331,159.309 108.331,161.696 107.544,162.484 107.544,183.032 110.236,185.725 110.236,194.259 111.608,195.631 115.405,195.631 v1(115.824,195.212)
EBI_A2: FPGA.C17 GG.L3 | length 67
  Top Layer w0.1: v1(107.569,149.123) 107.569,149.53 GG.L3@107.963,149.924 ; FPGA.C17@116.236,197.224 116.624,197.612 v1(116.637,197.612)
  Mid-Layer 3 w0.1: v1(107.569,149.123) 103.022,149.123 102.997,149.149 102.997,169.393 105.867,172.263 105.867,197.815 106.07,198.018 116.23,198.018 v1(116.637,197.612)
EBI_A3: FPGA.C18 GG.J7 SRAM.11 | length 92.1
  Top Layer w0.1: SRAM.11@108.344,116.524 v1(108.344,121.031) ; FPGA.C18@117.036,197.224 v1(117.805,197.224) ; GG.J7@111.163,151.333 111.354,151.333 v1(111.557,151.13) GG.J7@111.163,151.524 GG.J7@111.163,151.333
  Mid-Layer 3 w0.1: v1(108.344,121.031) 114.325,127.012 114.325,151.409 114.198,151.536 111.963,151.536 v1(111.557,151.13)
  MidLayer4 w0.1: v1(111.557,151.13) 111.557,151.308 111.938,151.689 111.938,153.619 113.081,154.762 113.386,154.762 113.513,154.89 113.513,155.245 113.792,155.524 115.011,155.524 117.805,158.318 117.805,189.76 117.648,189.918 117.648,190.46 117.805,190.618 v1(117.805,197.224)
  other v1: 111.557,151.13